# Altium PCB ComboCamera.PcbDoc (part 1 of 2)
Units mm, origin at the board's own origin, x right, y up, seen from the top; angles counter-clockwise.
Board outline 54.59 x 25.9 mm, 6 copper layers (L1, L2, Layer 1, Layer 2, L5, L6), stack 1.597 mm thick; 83 components, 54 nets, 269 pads, 161 vias.
Unrouted connection lines stored in the file: 227.
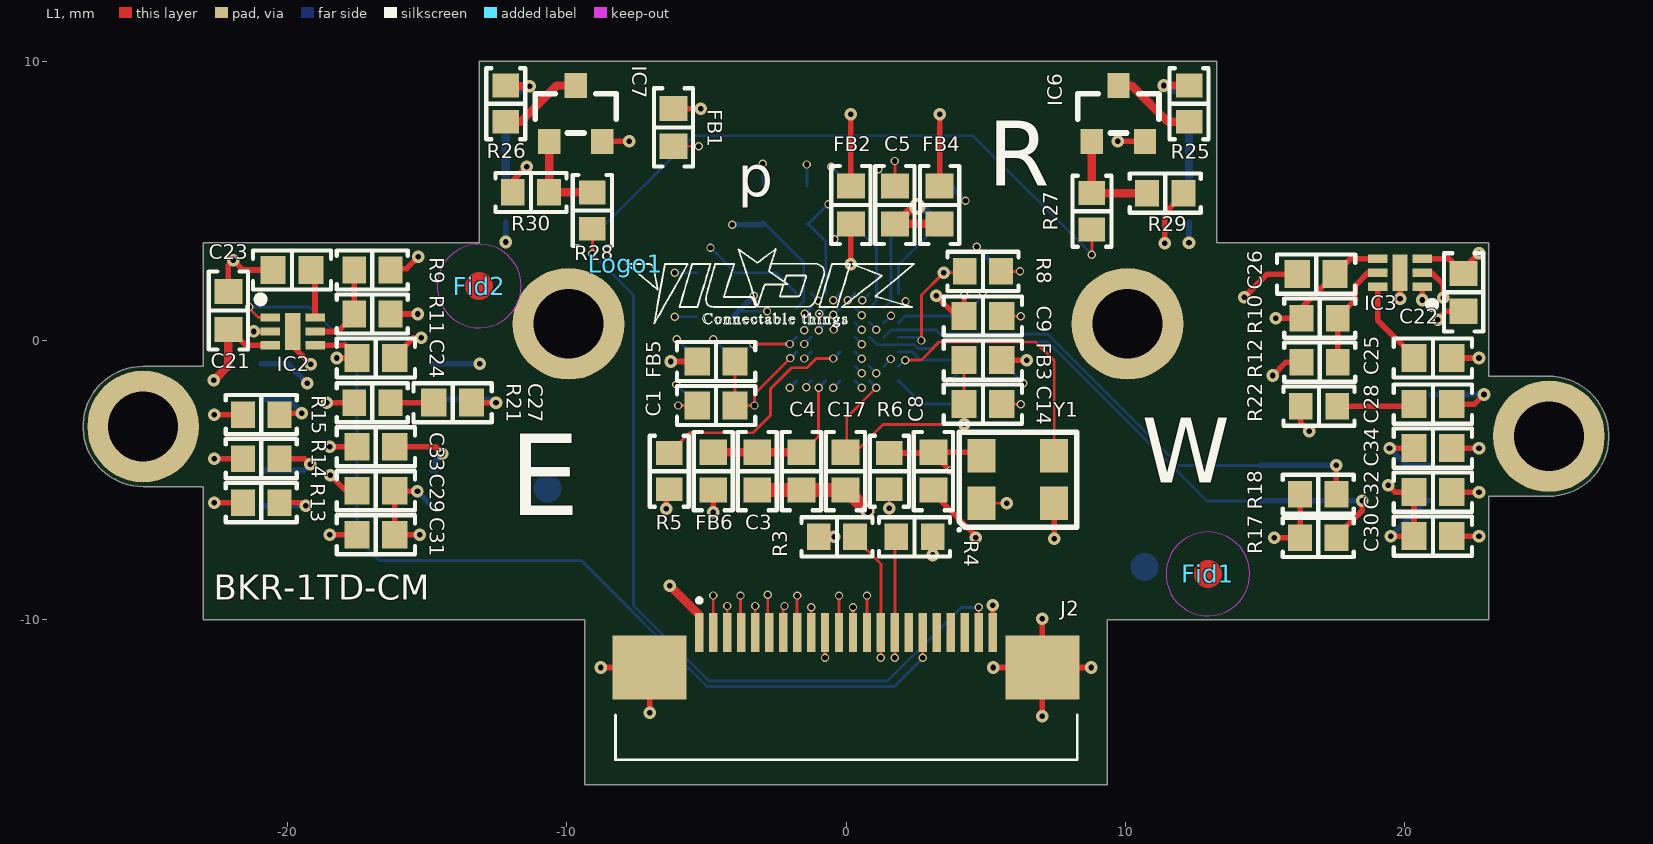
[diagram p0: L1 view]
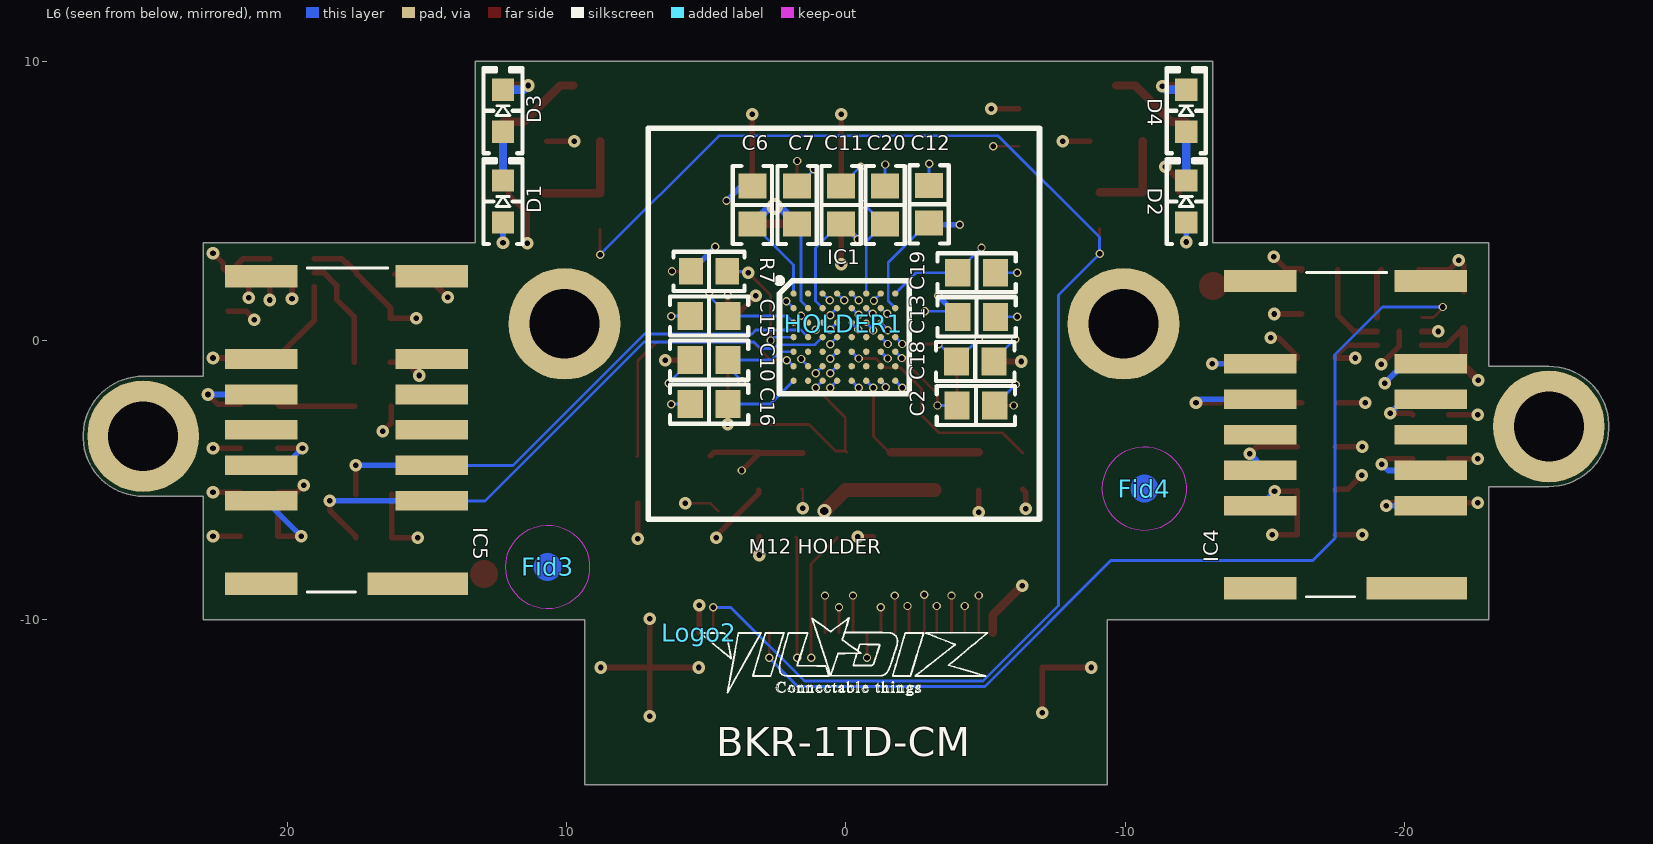
[diagram p1: L6 view, seen from below]
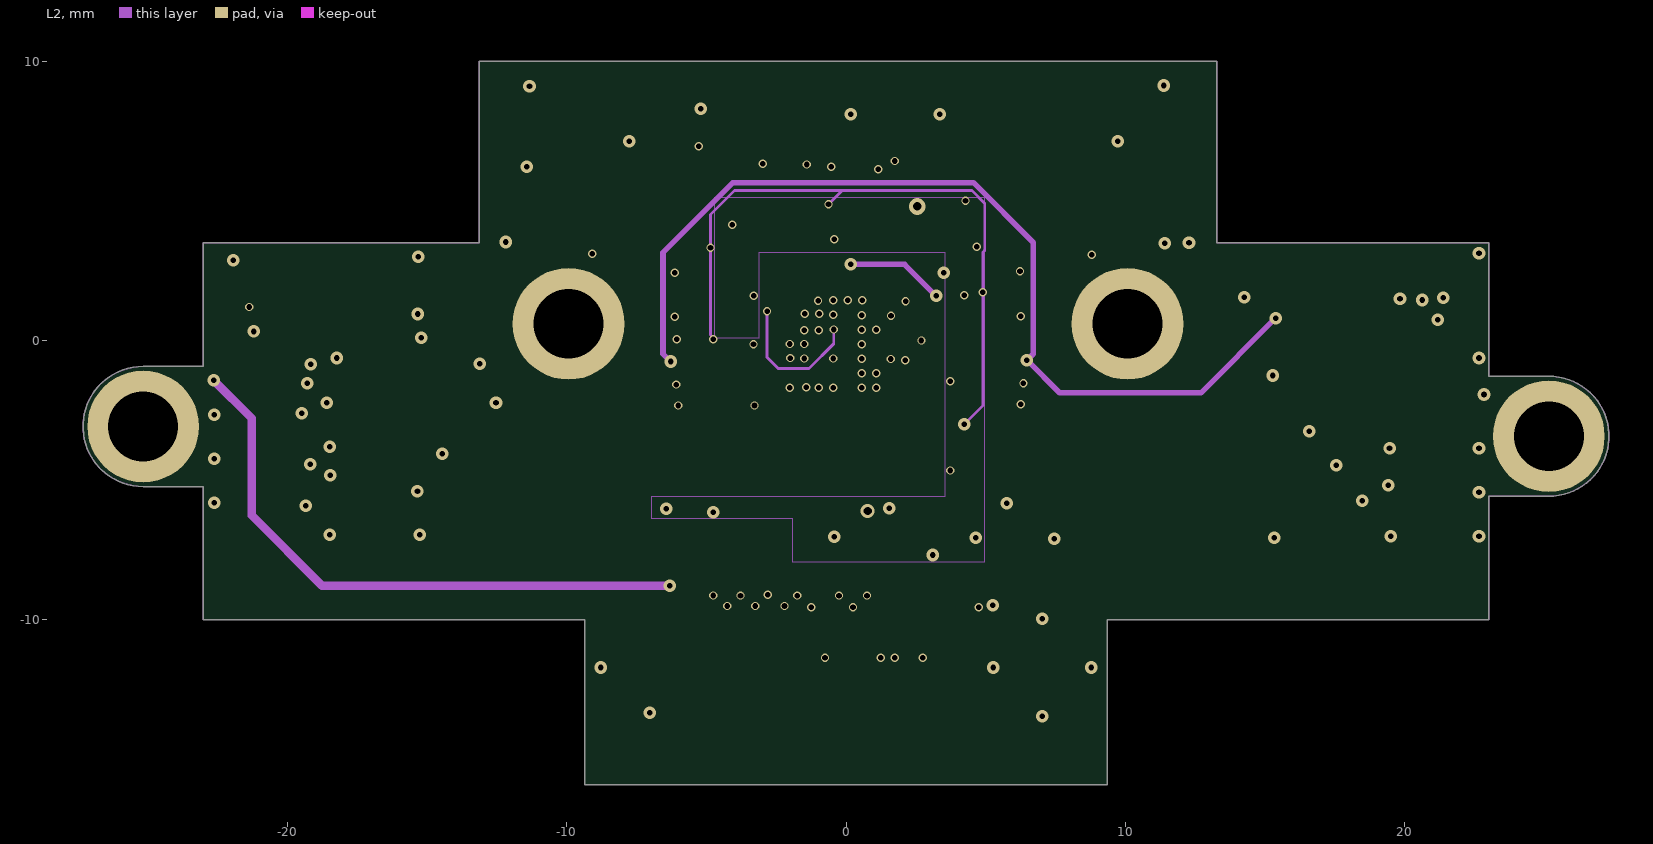
[diagram p2: L2]
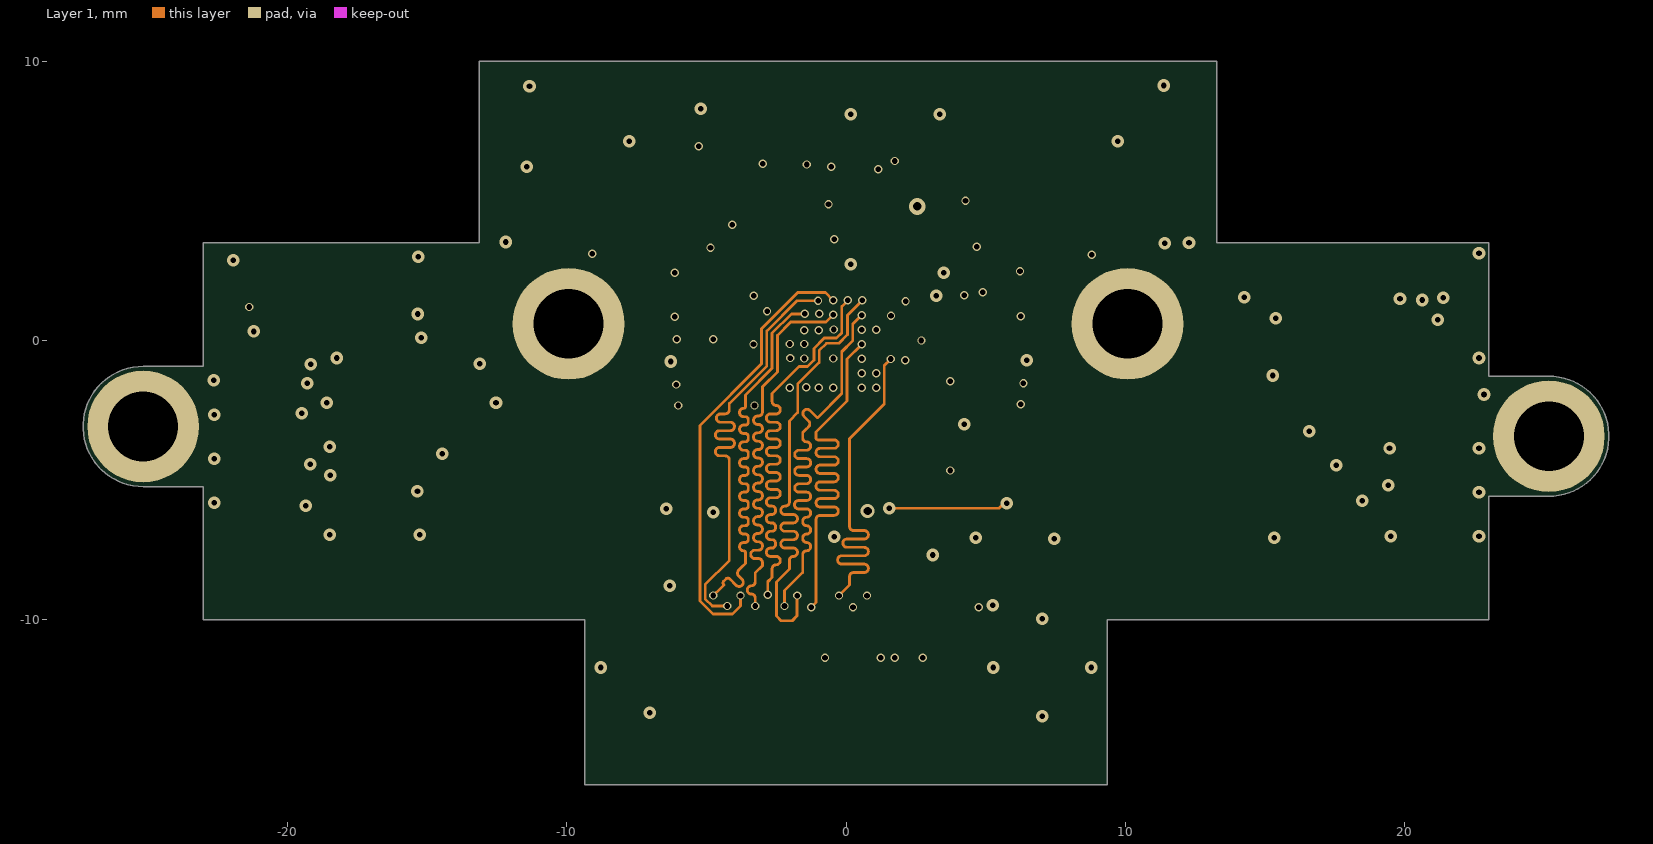
[diagram p3: Layer 1]
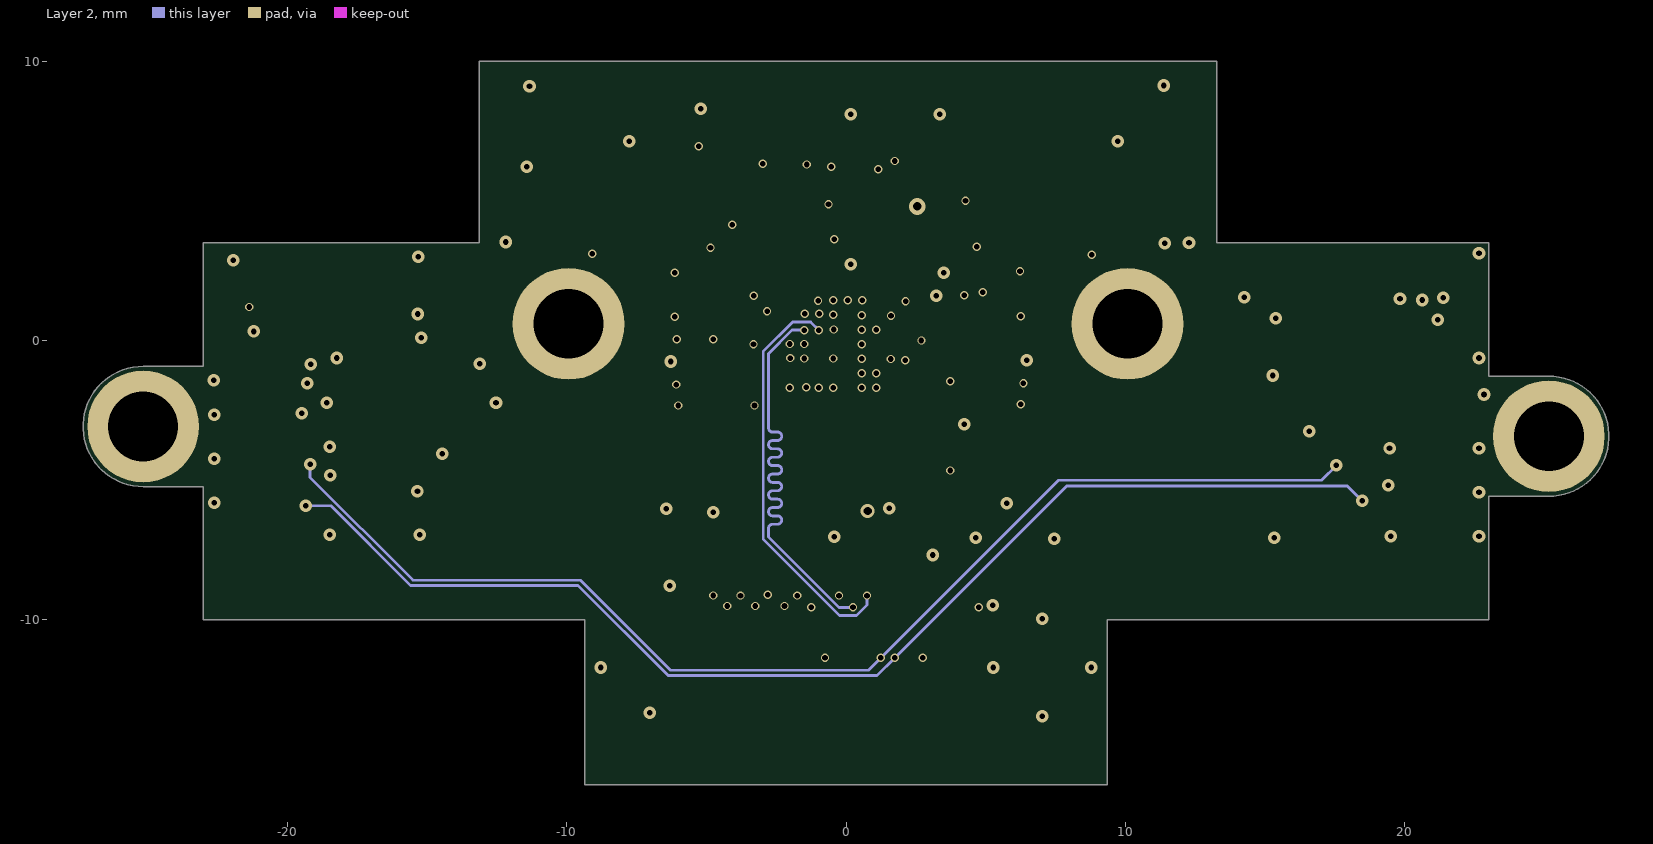
[diagram p4: Layer 2]
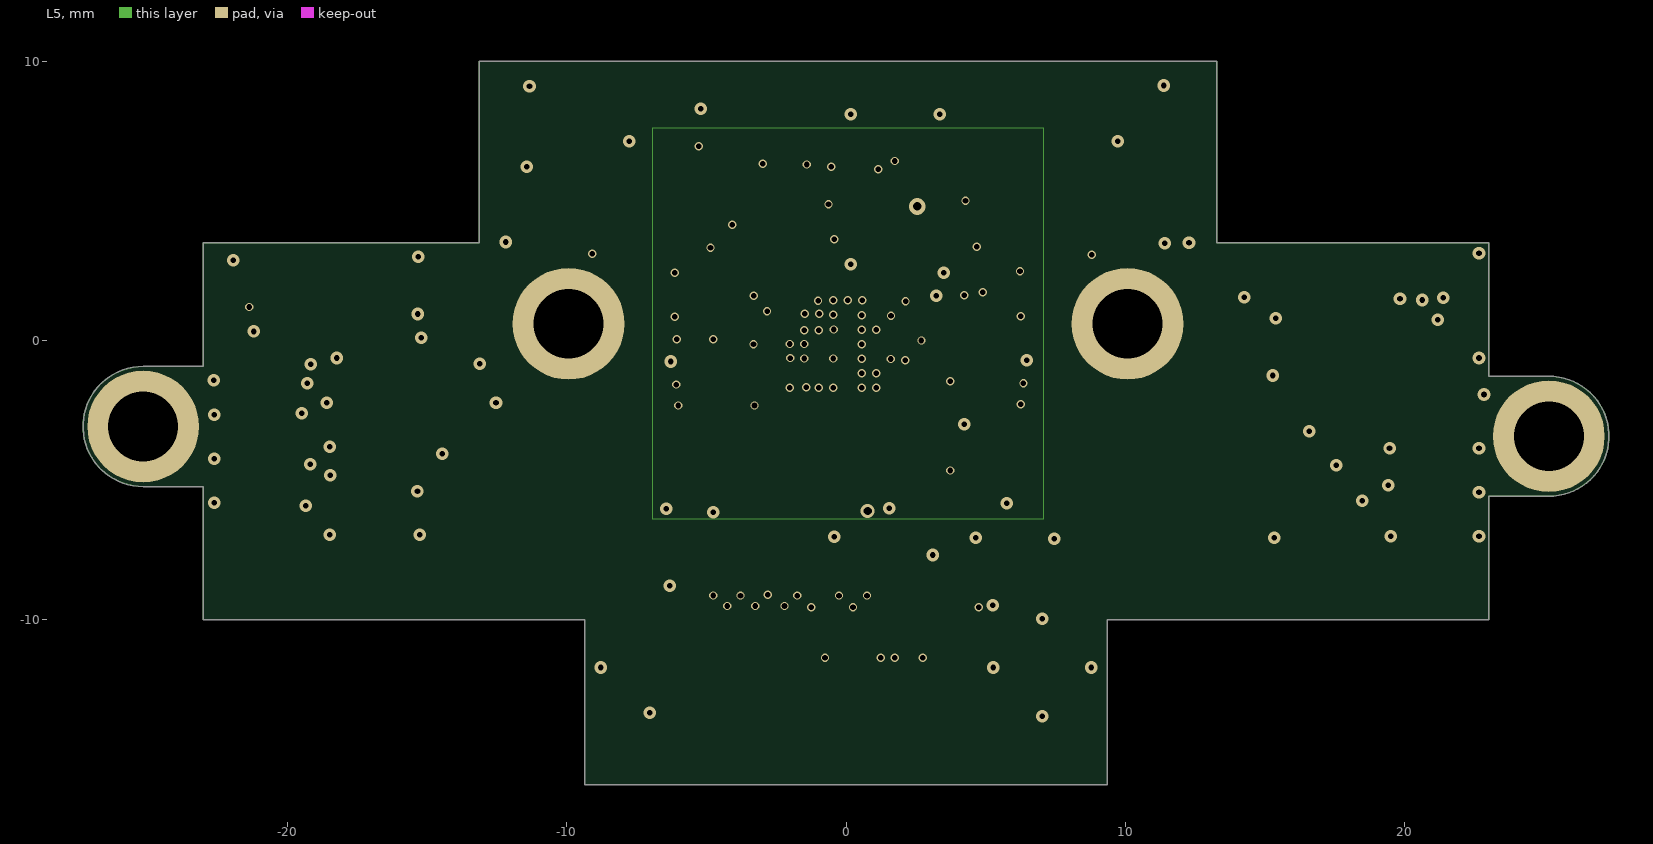
[diagram p5: L5]
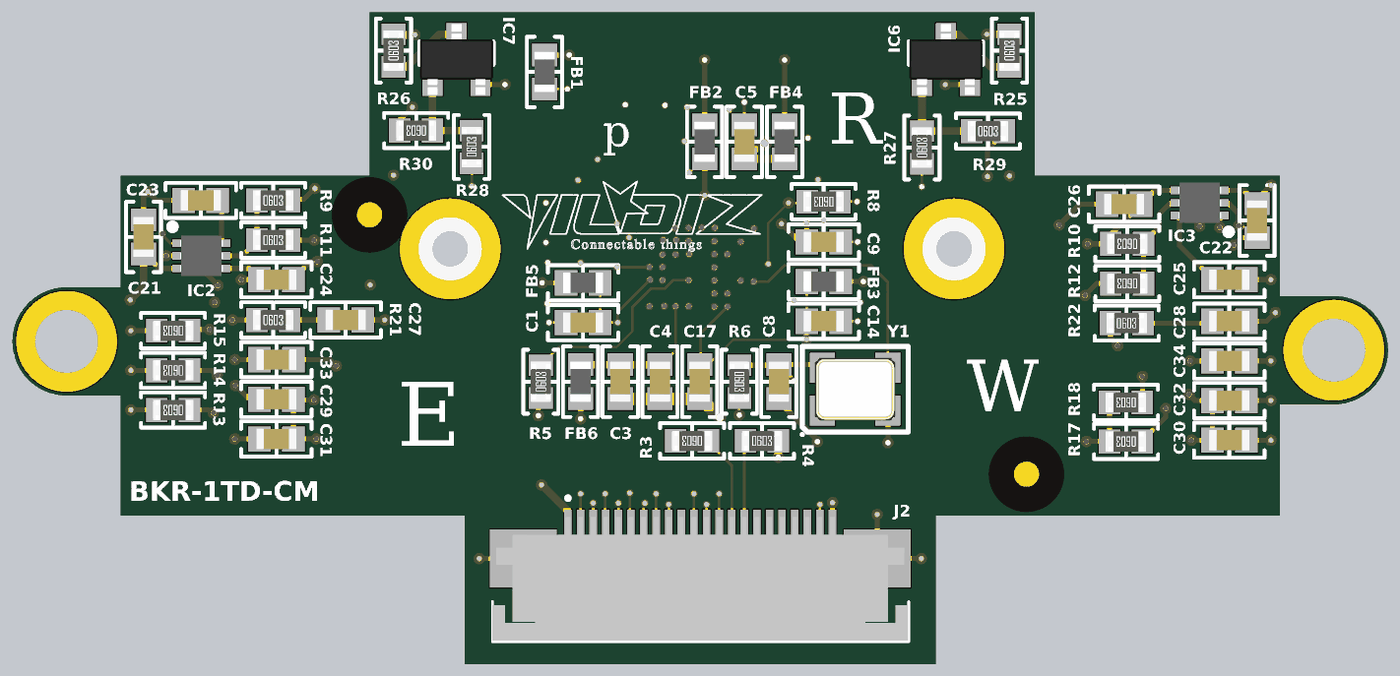
[diagram p6: 3D render of the assembled board from above, using the file's embedded part models]
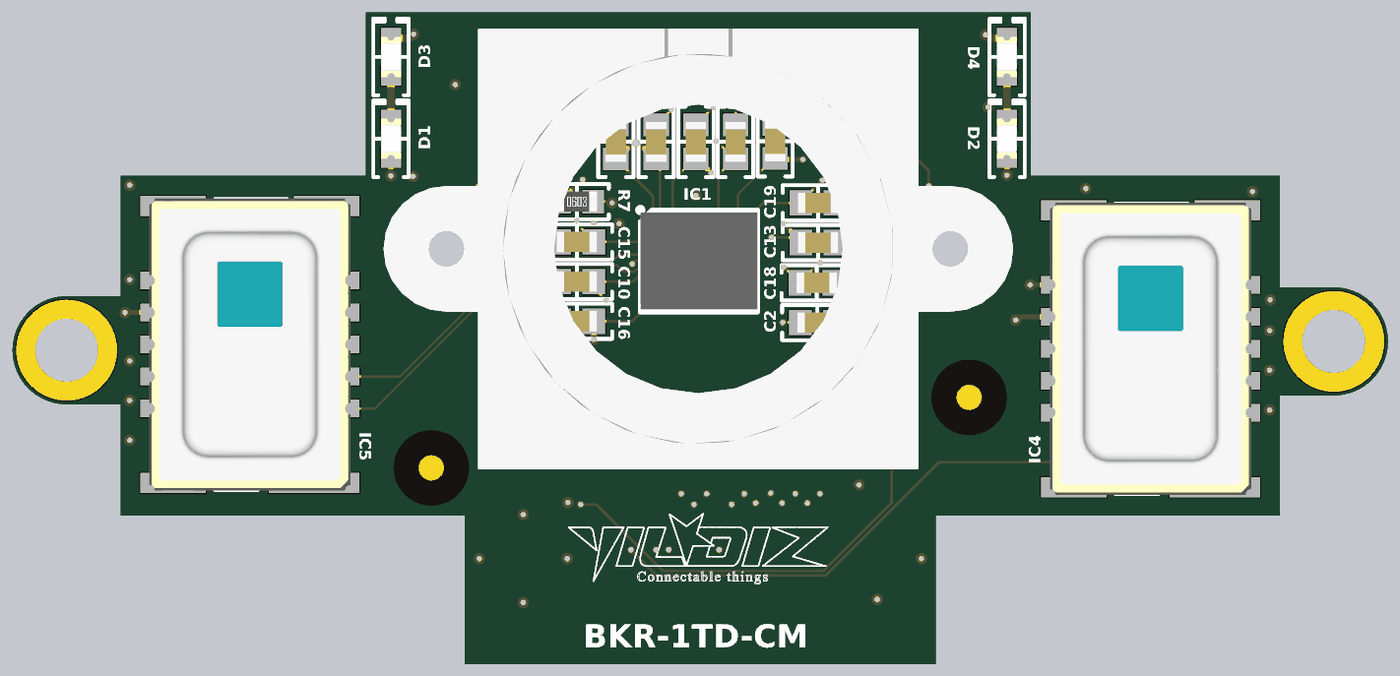
[diagram p7: 3D render of the assembled board from below, using the file's embedded part models]

## Layer stack, top to bottom
Top Solder: solder mask 0.0102, Solder Resist, Dk 3.5
L1: signal copper 0.035
Prepreg 1: prepreg 0.1, 2313, Dk 4.05
L2: signal copper 0.0175
Core 1: core 0.565, Core-009, Dk 4.5
Layer 1: signal copper 0.0175
Prepreg 2: prepreg 0.127, 2116, Dk 4.25
Layer 2: signal copper 0.0175
Core 2: core 0.565, Core-009, Dk 4.5
L5: signal copper 0.0175
Prepreg 3: prepreg 0.1, 2313, Dk 4.05
L6: signal copper 0.035
Bottom Solder: solder mask 0.0102, Solder Resist, Dk 3.5

## Board outline
-23,-10 -23,-5.225 -25.15,-5.225 cw(c-25.15,-3.075) -25.15,-0.925 -23,-0.925 -23,3.5 -13.125,3.5 -13.125,10 13.275,10 13.275,3.5 23,3.5 23,-1.275 25.15,-1.275 cw(c25.15,-3.425) 25.15,-5.575 23,-5.575 23,-10 9.35,-10 9.35,-15.9 -9.35,-15.9 -9.35,-10

## Design rules (kind name [scope] priority, off if disabled: settings)
Clearance [All] p1: gap=0.089 ignorepadtopadclearanceinfootprint=FALSE
MatchedLengths "Schematic Matched Net Lengths" [InNetClass('DCMI')] p1: tolerance=2.54 checknetsindiffpair=FALSE checkdiffpairvsdiffpair=TRUE checkxsignals=TRUE checkothers=TRUE
PolygonConnect [All] p1: connectstyle=Direct reliefconductorwidth=0.254 reliefentries=4 polygonreliefangle="90 Angle" airgapwidth=0.254
RoutingVias [All] p1: holewidth=0.2 width=0.3 viastyle="Through Hole" minholewidth=0.2 minwidth=0.3 maxholewidth=5 maxwidth=5
SolderMaskExpansion [All] p1: expansion=0.05
Width [All] p1: maxlimit=10 minlimit=0.089 preferedwidth=0.089
30 further rules are at their usual default settings.

## Classes and differential pairs
component class ComboCamera: Fid1 Fid2 Fid3 Fid4 Logo1
net class DCMI: DCMI_D0 DCMI_D1 DCMI_D2 DCMI_D3 DCMI_D4 DCMI_D5 DCMI_D6 DCMI_D7 DCMI_HSYNC DCMI_PIXCK DCMI_VSYNC
net class DCMI_D[0..7]: DCMI_D0 DCMI_D1 DCMI_D2 DCMI_D3 DCMI_D4 DCMI_D5 DCMI_D6 DCMI_D7
net class D[0..7]: D0 D1 D2 D3 D4 D5 D6 D7
component class "U_Thermal Camera": C27 C28 C29 C30 C31 C32 C33 C34 IC4 IC5 R13 R14 R15 R17 R18 R21 R22
component class U_Power: C21 C22 C23 C24 C25 C26 FB2 FB3 FB4 FB5 FB6 IC2 IC3 R9 R10 R11 R12
component class U_LED: D1 D2 D3 D4 IC6 IC7 R25 R26 R27 R28 R29 R30
component class U_Expansion: J2
component class "U_Digital Camera": C1 C2 C3 C4 C5 C6 C7 C8 C9 C10 C11 C12 C13 C14 C15 C16 C17 C18 C19 C20 FB1 HOLDER1 IC1 R3 R4 R5 R6 R7 R8 Y1

## Components (designator, comment, footprint, x,y, rotation, side; value= is the part's Value field where it differs from the comment)
C1 "1uF" "CAP 0603/1608" -4.65,-2.325 r0 top
C2 "100nF" "CAP 0603/1608" -4.65,-2.325 r0 bottom
C3 "1uF" "CAP 0603/1608" -3.175,-4.675 r90 top
C4 "100nF" "CAP 0603/1608" -1.6,-4.675 r90 top
C5 "1uF" "CAP 0603/1608" 1.75,4.85 r270 top
C6 "100nF" "CAP 0603/1608" 3.35,4.85 r270 bottom
C7 "100nF" "CAP 0603/1608" 1.75,4.85 r270 bottom
C8 "100nF" "CAP 0603/1608" 3.125,-4.675 r90 top
C9 "1uF" "CAP 0603/1608" 4.9,0.875 r180 top
C10 "100nF" "CAP 0603/1608" 4.9,-0.7 r180 bottom
C11 "100nF" "CAP 0603/1608" 0.175,4.85 r270 bottom
C12 "100nF" "CAP 0603/1608" -2.975,4.875 r270 bottom
C13 "100nF" "CAP 0603/1608" -4.675,0.85 r0 bottom
C14 "1uF" "CAP 0603/1608" 4.9,-2.275 r180 top
C15 "100nF" "CAP 0603/1608" 4.9,0.875 r180 bottom
C16 "100nF" "CAP 0603/1608" 4.9,-2.275 r180 bottom
C17 "100nF" "CAP 0603/1608" -0.025,-4.675 r90 top
C18 "100nF" "CAP 0603/1608" -4.625,-0.75 r0 bottom
C19 "100nF" "CAP 0603/1608" -4.675,2.425 r0 bottom
C20 "100nF" "CAP 0603/1608" -1.4,4.85 r270 bottom
C21 "1uF" "CAP 0603/1608" -22.1,1.075 r270 top
C22 "1uF" "CAP 0603/1608" 22.1,1.725 r90 top
C23 "100nF" "CAP 0603/1608" -19.825,2.525 r0 top
C24 "1uF" "CAP 0603/1608" -16.825,-0.625 r180 top
C25 "100nF" "CAP 0603/1608" 21,-0.625 r180 top
C26 "1uF" "CAP 0603/1608" 16.825,2.375 r0 top
C27 "1uF" "CAP 0603/1608" -14.075,-2.225 r0 top
C28 "1uF" "CAP 0603/1608" 21,-2.275 r0 top
C29 "100nF" "CAP 0603/1608" -16.825,-5.375 r180 top
C30 "100nF" "CAP 0603/1608" 21,-7 r0 top
C31 "10uF" "CAP 0603/1608" -16.825,-6.95 r0 top
C32 "10uF" "CAP 0603/1608" 21,-5.425 r180 top
C33 "1.5uF" "CAP 0603/1608" -16.825,-3.8 r180 top
C34 "1.5uF" "CAP 0603/1608" 21,-3.85 r0 top
D1 "#NAME?" "LED 0603/1608" 12.275,4.975 r90 bottom
D2 "#NAME?" "LED 0603/1608" -12.175,4.975 r90 bottom
D3 "#NAME?" "LED 0603/1608" 12.275,8.225 r90 bottom
D4 "#NAME?" "LED 0603/1608" -12.175,8.225 r90 bottom
FB1 "#NAME?" "FER 0603/1608" -6.175,7.625 r90 top
FB2 "#NAME?" "FER 0603/1608" 0.175,4.85 r90 top
FB3 "#NAME?" "FER 0603/1608" 4.9,-0.7 r0 top
FB4 "#NAME?" "FER 0603/1608" 3.35,4.85 r90 top
FB5 "#NAME?" "FER 0603/1608" -4.65,-0.75 r180 top
FB6 "#NAME?" "FER 0603/1608" -4.75,-4.675 r270 top
Fid1 "Fiducial mark" Fiducial 12.95,-8.35 r0 top
Fid2 "Fiducial mark" Fiducial -13.125,1.95 r90 top
Fid3 "Fiducial mark" Fiducial 10.675,-8.1 r90 bottom
Fid4 "Fiducial mark" Fiducial -10.675,-5.3 r90 bottom
HOLDER1 "#NAME?" "M12 LENS HOLDER" 0.075,0.6 r0 bottom locked
IC1 "#NAME?" "ON SEMI MT9M114 BGA-55" 0.056,0.12 r180 bottom locked
IC2 "#NAME?" "MICREL MLF-6 1.6x1.6MM" -19.8,0.325 r0 top
IC3 "#NAME?" "MICREL MLF-6 1.6x1.6MM" 19.825,2.425 r180 top
IC4 "#NAME?" "PANASONIC AMG8853" -17.875,-3.37 r90 bottom locked
IC5 "#NAME?" "PANASONIC AMG8853" 17.875,-3.2 r90 bottom locked
IC6 "#NAME?" "DIODES SOT-23-3" 9.75,8.125 r90 top
IC7 "#NAME?" "DIODES SOT-23-3" -9.675,8.125 r90 top
J2 "#NAME?" fpc-22 0,-11.075 r0 top locked
Logo1 "Logo symbol" LOGO_YILDIZIOT -7.875,2.75 r0 top
Logo2 "Logo symbol" LOGO_YILDIZIOT 5.25,-10.45 r180 bottom (schematic designator Logo1)
R3 "1.5kR" "RES 0603/1608" -0.325,-7.025 r180 top
R4 "1.5kR" "RES 0603/1608" 2.45,-7.025 r0 top
R5 "10kR" "RES 0603/1608" -6.325,-4.675 r90 top
R6 "10kR" "RES 0603/1608" 1.55,-4.675 r270 top
R7 "10kR" "RES 0603/1608" 4.9,2.475 r180 bottom
R8 "10kR" "RES 0603/1608" 4.9,2.475 r180 top
R9 "14kR" "RES 0603/1608" -16.95,2.525 r0 top
R10 "4.42kR" "RES 0603/1608" 16.95,0.8 r180 top
R11 "10kR" "RES 0603/1608" -16.95,0.95 r0 top
R12 "10kR" "RES 0603/1608" 16.95,-0.775 r180 top
R13 "10kR" "RES 0603/1608" -20.925,-5.8 r180 top
R14 "10kR" "RES 0603/1608" -20.925,-4.225 r180 top
R15 "10kR" "RES 0603/1608" -20.925,-2.65 r180 top
R17 "10kR" "RES 0603/1608" 16.9,-7.05 r180 top
R18 "10kR" "RES 0603/1608" 16.9,-5.5 r180 top
R21 "20R" "RES 0603/1608" -16.95,-2.225 r0 top
R22 "20R" "RES 0603/1608" 16.925,-2.35 r0 top
R25 "10R" "RES 0603/1608" 12.275,8.475 r90 top
R26 "10R" "RES 0603/1608" -12.175,8.475 r90 top
R27 "220R" "RES 0603/1608" 8.8,4.625 r90 top
R28 "220R" "RES 0603/1608" -9.075,4.65 r90 top
R29 "10kR" "RES 0603/1608" 11.425,5.275 r0 top
R30 "10kR" "RES 0603/1608" -11.275,5.3 r180 top
Y1 "24MHz" "Abracon ASTX-11" 6.15,-4.975 r0 top

## Footprints (in the part's own frame and the unit in brackets; to place one, negate y for a bottom-side part, rotate by r counter-clockwise, add the part's x,y. Pads: shape width x height; smd on the part's side, far side on the other; paste and mask are expansions set on the pad)
"Abracon ASTX-11" [mm] "Crystal, 4-Leads, Body 2.50x3.20mm, Pitch 2.38mm, IPC Medium Density"
  rect 1x1.2 smd: 1(-1.3,-0.85) 2(1.3,-0.85) 3(1.3,0.85) 4(-1.3,0.85)
  silkscreen extent -2.15,-1.85 2.1,1.7, body extent -1.61,-1.26 1.61,1.26, height 0.9
"CAP 0603/1608" [mm] "Chip Capacitor, 2-Leads, Body 1.60x0.80mm, IPC Medium Density"
  rect 0.9x1 smd: 1(-0.675,0) 2(0.675,0)
  silkscreen extent -1.4,-0.7 1.4,0.7, body extent -0.8,-0.41 0.8,0.41, height 0.82
"DIODES SOT-23-3" [mm] "SOT23, 3-Leads, Body 2.90x2.40mm, Pitch 0.95mm, IPC Medium Density"
  rect 0.9x0.8 smd: 1(-1,0.95) 2(-1,-0.95) 3(1,0)
  silkscreen extent -0.7,-1.45 0.7,1.45, body extent -1.41,-1.45 1.41,1.45, height 1.5
"FER 0603/1608" [mm] "Chip Ferrite, 2-Leads, Body 1.60x0.80mm, IPC Medium Density"
  rect 0.9x1 smd: 1(-0.675,0) 2(0.675,0)
  silkscreen extent -1.4,-0.7 1.4,0.7, body extent -0.8,-0.41 0.8,0.41, height 0.82
Fiducial [mm] "Electrolitic Radial Capacitor, 5mm pin space, 0.8mm Hole, 10.1mm diametre, 15.2 height"
  L1 circle w1: c0,0 r0
  L1 keep-out circle w0.01: c0,0 r1.5
fpc-22 [mm] "SFV22R-2STE1HLF"
  rect 0.3x1.4 smd: 1(-5.25,0.625) 2(-4.75,0.625) 3(-4.25,0.625) 4(-3.75,0.625) 5(-3.25,0.625) 6(-2.75,0.625) 7(-2.25,0.625) 8(-1.75,0.625) 9(-1.25,0.625) 10(-0.75,0.625) 11(-0.25,0.625) 12(0.25,0.625) 13(0.75,0.625) 14(1.25,0.625) 15(1.75,0.625) 16(2.25,0.625) 17(2.75,0.625) 18(3.25,0.625) 19(3.75,0.625) 20(4.25,0.625) 21(4.75,0.625) 22(5.25,0.625)
  rect 2.65x2.3 smd: MP1(-7.025,-0.625) MP2(7.025,-0.625)
  silkscreen extent -8.25,-3.93 8.27,1.82, body extent -8.25,-3.88 8.25,1.02, height 1.82
"LED 0603/1608" [mm] "Chip Diode, 2-Leads, Body 1.60x0.80mm, IPC Medium Density"
  rect 0.8x0.8 smd: 1(-0.75,0) 2(0.75,0)
  silkscreen extent -1.52,-0.7 1.52,0.7, body extent -0.8,-0.4 0.8,0.4, height 0.53
LOGO_YILDIZIOT [mm] "YýLDýZ IoT Logo"
  silkscreen extent 0.02,-2.27 10.31,0.53
"M12 LENS HOLDER" [mm]
  round 4 hole 2.5: GND(-10,0) GND(10,0)
  silkscreen extent -7,-7 7,7, body extent -12.5,-8.75 12.5,8.75, height 14.1
"MICREL MLF-6 1.6x1.6MM" [mm] "6-UFDFN Exposed Pad, 6-TMLF®"
  rect 0.7x0.3 smd: 1(-0.8,0.5) 2(-0.8,0) 3(-0.8,-0.5) 4(0.8,-0.5) 5(0.8,0) 6(0.8,0.5)
  rect 0.55x1.31 smd: 7(0,0)
  silkscreen extent -1.27,1.03 -1.02,1.27, body extent -0.85,-0.8 0.85,0.8, height 0.6
"ON SEMI MT9M114 BGA-55" [mm] "ODCSP55 4.7x3.9 55-Ball Package"
  round 0.226 smd: A1(-1.82,1.56) A2(-1.3,1.56) A3(-0.78,1.56) A4(-0.26,1.56) A5(0.26,1.56) A6(0.78,1.56) A7(1.3,1.56) A8(1.82,1.56) B1(-1.82,1.04) B2(-1.3,1.04) B3(-0.78,1.04) B4(-0.26,1.04) B5(0.26,1.04) B6(0.78,1.04) B7(1.3,1.04) B8(1.82,1.04) C1(-1.82,0.52) C2(-1.3,0.52) C3(-0.78,0.52) C4(-0.26,0.52) C5(0.26,0.52) C6(0.78,0.52) C7(1.3,0.52) D1(-1.82,0) D2(-1.3,0) D3(-0.78,0) D4(-0.26,0) D5(0.26,0) D6(0.78,0) D7(1.3,0) D8(1.82,0) E1(-1.82,-0.52) E2(-1.3,-0.52) E3(-0.78,-0.52) E4(-0.26,-0.52) E5(0.26,-0.52) E6(0.78,-0.52) E7(1.3,-0.52) E8(1.82,-0.52) F1(-1.82,-1.04) F2(-1.3,-1.04) F3(-0.78,-1.04) F4(-0.26,-1.04) F5(0.26,-1.04) F6(0.78,-1.04) F7(1.3,-1.04) F8(1.82,-1.04) G1(-1.82,-1.56) G2(-1.3,-1.56) G3(-0.78,-1.56) G4(-0.26,-1.56) G5(0.26,-1.56) G6(0.78,-1.56) G7(1.3,-1.56) G8(1.82,-1.56)
  silkscreen extent -2.42,-2.02 2.32,2.12, body extent -2.32,-1.92 2.32,1.92, height 0.74
"PANASONIC AMG8853" [mm]
  rect 0.8x3.6 smd: 1(-5.5,-2.55)
  rect 0.7x2.6 smd: 2(-2.54,-3.05) 3(-1.27,-3.05) 4(0,-3.05) 5(1.27,-3.05) 6(2.54,-3.05) 9(2.54,3.05) 10(1.27,3.05) 11(0,3.05) 12(-1.27,3.05) 13(-2.54,3.05)
  rect 0.8x2.6 smd: 7(5.5,-3.05) 8(5.5,3.05) 14(-5.5,3.05)
  silkscreen extent -5.8,-1.47 5.8,1.4, body extent -5.8,-4 5.8,4, height 4.3
"RES 0603/1608" [mm] "Chip Resistor, 2-Leads, Body 1.60x0.80mm, IPC Medium Density"
  rect 0.85x0.95 smd: 1(-0.65,0) 2(0.65,0)
  silkscreen extent -1.27,-0.7 1.27,0.7, body extent -0.8,-0.4 0.8,0.4, height 0.45

## Part data
C1 C3 C5 C9 C14 C21 C22 C24 C26 C27 C28: library part "Capacitor - Ceramic", "Ceramic, SMT Capacitor", Case/Package=0603, Case Code (Metric)=1608, Dielectric=X5R, Manufacturer=Samsung, Manufacturer Part Number=CL10A105KP8NNNC, Max Operating Temperature=85°C, Min Operating Temperature=-55°C, Package Quantity=1, Supplier Part Number 1=1276-1182-1-ND, Tolerance=10%, Voltage=10V, Capacitance=1uF, Case Code (Imperial)=0603, ComponentLink1Description=https://datasheet.ciiva.com/15195/getdatasheetpartid-358616-15195708.pdf?src-supplier=Verical, ComponentLink1URL=https://datasheet.ciiva.com/15195/getdatasheetpartid-358616-15195708.pdf?src-supplier=Verical, ComponentLink2Description=https://datasheet.ciiva.com/16358/cl05b104kq5nnnc-16358431.pdf?src-supplier=Future+Electronics, ComponentLink2URL=https://datasheet.ciiva.com/16358/cl05b104kq5nnnc-16358431.pdf?src-supplier=Future+Electronics, Contact Plating=Tin, Depth=0.8mm, Height=0.8mm, Length=1.6mm, Mount="Surface Mount", Packaging="Tape and Reel", Pricing 1="1 = 0,10000, 10 = 0,03800, 100 = 0,01680, 500 = 0,01200, 1000 = 0,00943 (USD)", Radiation Hardening=No, RoHS=Yes, Stock 1=4590831, Supplier 1=Digi-Key, Thickness=0.035inch, Voltage Rating=10V, Width=0.031inch
C2 C4 C6 C7 C8 C10 C11 C12 C13 C15 C16 C17 C18 C19 C20 C23 C25 C29 C30: library part "Capacitor - Ceramic", "Ceramic, SMT Capacitor", Case/Package=0603, Case Code (Metric)=1608, Dielectric=X7R, Manufacturer=Samsung, Manufacturer Part Number=CL10B104JB8NNNC, Max Operating Temperature=125°C, Min Operating Temperature=-55°C, Package Quantity=1, Supplier Part Number 1=1276-1033-1-ND, Tolerance=5%, Voltage=50V, Capacitance=100nF, Case Code (Imperial)=0603, ComponentLink1Description=https://media.digikey.com/pdf/Data%20Sheets/Samsung%20PDFs/CL_Series_MLCC_ds.pdf?src-supplier=Digi-Key, ComponentLink1URL=https://media.digikey.com/pdf/Data%20Sheets/Samsung%20PDFs/CL_Series_MLCC_ds.pdf?src-supplier=Digi-Key, ComponentLink2Description=https://www.verical.com/server-webapp/html/getDatasheet?partID=359321&src-supplier=Verical, ComponentLink2URL=https://www.verical.com/server-webapp/html/getDatasheet?partID=359321&src-supplier=Verical, ComponentLink3Description=http://www1.futureelectronics.com/doc/SAMSUNG/CL10B104JB8NNNC.pdf?src-supplier=Future+Electronics, ComponentLink3URL=http://www1.futureelectronics.com/doc/SAMSUNG/CL10B104JB8NNNC.pdf?src-supplier=Future+Electronics, ComponentLink4Description=https://produktinfo.conrad.com/datenblaetter/450000-474999/456613-da-01-en-VS_KONDENSATOR_0603.pdf?src-supplier=Conrad, ComponentLink4URL=https://produktinfo.conrad.com/datenblaetter/450000-474999/456613-da-01-en-VS_KONDENSATOR_0603.pdf?src-supplier=Conrad, Contact Plating=Tin, Depth=0.8mm, Height=0.8mm, Length=1.6mm, Material=Ceramic, Mount="Surface Mount", Packaging="Tape and Reel", Pricing 1="1 = 0,10000, 10 = 0,05300, 100 = 0,02350, 500 = 0,01680, 1000 = 0,01320 (USD)", Radiation Hardening=No, RoHS=Yes, Stock 1=223594, Supplier 1=Digi-Key, Thickness=0.035inch, Voltage Rating=50V, Width=0.031inch
C31 C32: library part "Capacitor - Ceramic", "Ceramic, SMT Capacitor", Case/Package=0603, Case Code (Metric)=1608, Dielectric=X5R, Manufacturer=Samsung, Manufacturer Part Number=CL10A106MQ8NNNC, Max Operating Temperature=85°C, Min Operating Temperature=-55°C, Package Quantity=1, Supplier Part Number 1=1276-1119-1-ND, Tolerance=20%, Voltage=6.3V, Capacitance=10uF, Case Code (Imperial)=0603, ComponentLink1Description=https://datasheet.ciiva.com/25798/cl10a106mq8nnnc-25798320.pdf?src-supplier=Digi-Key, ComponentLink1URL=https://datasheet.ciiva.com/25798/cl10a106mq8nnnc-25798320.pdf?src-supplier=Digi-Key, ComponentLink2Description=https://datasheet.ciiva.com/26838/getdatasheetpartid-357557-26838347.pdf?src-supplier=Verical, ComponentLink2URL=https://datasheet.ciiva.com/26838/getdatasheetpartid-357557-26838347.pdf?src-supplier=Verical, ComponentLink3Description=https://datasheet.ciiva.com/16437/cl05b104kq5nnnc-16437327.pdf?src-supplier=Future+Electronics, ComponentLink3URL=https://datasheet.ciiva.com/16437/cl05b104kq5nnnc-16437327.pdf?src-supplier=Future+Electronics, Contact Plating=Tin, Depth=0.8mm, Height=0.8mm, Length=1.6mm, Mount="Surface Mount", Packaging="Tape and Reel", Pricing 1="1 = 0,15000, 10 = 0,11000, 100 = 0,05150, 500 = 0,03614, 1000 = 0,02992 (USD)", Radiation Hardening=No, RoHS=Yes, Stock 1=4408315, Supplier 1=Digi-Key, Thickness=0.035inch, Voltage Rating=6.3V, Width=0.031inch
C33 C34: library part "Capacitor - Ceramic", "Ceramic, SMT Capacitor", Case/Package=0603, Case Code (Metric)=1608, Manufacturer=TDK, Manufacturer Part Number=C1608X7S1C155K080AC, Max Operating Temperature=125°C, Min Operating Temperature=-55°C, Supplier Part Number 1=445-174769-1-ND, Tolerance=10%, Voltage Rating=16V, Capacitance=1.5uF, Case Code (Imperial)=0603, ComponentLink1Description=https://datasheet.ciiva.com/15195/getdatasheetpartid-358616-15195708.pdf?src-supplier=Verical, ComponentLink1URL=https://datasheet.ciiva.com/15195/getdatasheetpartid-358616-15195708.pdf?src-supplier=Verical, ComponentLink2Description=https://datasheet.ciiva.com/16358/cl05b104kq5nnnc-16358431.pdf?src-supplier=Future+Electronics, ComponentLink2URL=https://datasheet.ciiva.com/16358/cl05b104kq5nnnc-16358431.pdf?src-supplier=Future+Electronics, ComponentLink3Description=https://product.tdk.com/info/en/catalog/spec/mlccspec_commercial_general_midvoltage_en.pdf?src-supplier=Digi-Key, ComponentLink3URL=https://product.tdk.com/info/en/catalog/spec/mlccspec_commercial_general_midvoltage_en.pdf?src-supplier=Digi-Key, ComponentLink4Description=https://product.tdk.com/info/en/catalog/datasheets/mlcc_commercial_general_en.pdf?src-supplier=Digi-Key, ComponentLink4URL=https://product.tdk.com/info/en/catalog/datasheets/mlcc_commercial_general_en.pdf?src-supplier=Digi-Key, Mount="Surface Mount", Packaging="Tape and Reel", Pricing 1="1 = 0,23000, 10 = 0,15900, 100 = 0,09030, 500 = 0,06376, 1000 = 0,05579 (USD)", RoHS=No, Stock 1=2796, Supplier 1=Digi-Key
D1 D3: library part LED, "Chip LED", Manufacturer="Wurth Electronics", Manufacturer Part Number=15406085BA300, Supplier Part Number 1=732-12005-1-ND, ComponentLink1Description=http://katalog.we-online.de/pbs/datasheet/15406085BA300.pdf?src-supplier=Digi-Key, ComponentLink1URL=http://katalog.we-online.de/pbs/datasheet/15406085BA300.pdf?src-supplier=Digi-Key, Pricing 1="1 = 0,60000, 10 = 0,54200, 100 = 0,50400, 500 = 0,46600, 1000 = 0,42800 (USD)", RoHS=No, Stock 1=3808, Supplier 1=Digi-Key
D2 D4: library part LED, "Chip LED", Case/Package=0603, Case Code (Metric)=1608, Color=White, Forward Voltage=3V, Lens Color=Clear, Manufacturer=Inolux, Manufacturer Part Number=IN-S63AT5UW, Supplier Part Number 1=1830-1063-1-ND, Test Current=5mA, Case Code (Imperial)=0603, ComponentLink1Description=http://katalog.we-online.de/pbs/datasheet/15406085BA300.pdf?src-supplier=Digi-Key, ComponentLink1URL=http://katalog.we-online.de/pbs/datasheet/15406085BA300.pdf?src-supplier=Digi-Key, ComponentLink2Description=http://www.inolux-corp.com/datasheet/SMDLED/Mono%20Color%20Top%20View/IN-S63AT%20Series_V1.1.pdf?src-supplier=Digi-Key, ComponentLink2URL=http://www.inolux-corp.com/datasheet/SMDLED/Mono%20Color%20Top%20View/IN-S63AT%20Series_V1.1.pdf?src-supplier=Digi-Key, Height=0.4mm, Length=1.6mm, Lens Size=0.8mm, Lens Style=Flat, Lens Transparency=Clear, Luminous Intensity=900mcd, Mount="Surface Mount", Packaging="Tape and Reel", Pricing 1="1 = 0,33000, 10 = 0,24000, 100 = 0,11360, 500 = 0,07576, 1000 = 0,05934 (USD)", RoHS=No, Stock 1=44672, Supplier 1=Digi-Key, Viewing Angle=120°, Width=0.8mm
FB1 FB2 FB3 FB4 FB5 FB6: library part "Ferrite Chip", "SMT Ferrite Chip", Case/Package=0603, Case Code (Metric)=1608, Current Rating=500mA, DC Resistance (DCR)=380mR, Frequency=100MHz, Manufacturer=Murata, Manufacturer Part Number=BLM18AG601SN1D, Max Operating Temperature=125°C, Min Operating Temperature=-55°C, Package Quantity=1, Supplier Part Number 1=490-1014-1-ND, Tolerance=25%, Case Code (Imperial)=0603, ComponentLink1Description=https://datasheet.ciiva.com/19460/1844766-19460213.pdf?src-supplier=Jameco, ComponentLink1URL=https://datasheet.ciiva.com/19460/1844766-19460213.pdf?src-supplier=Jameco, ComponentLink2Description=https://datasheet.ciiva.com/29347/442309-da-01-en-chip-drossel-0603-600r-500ma-1-6x0-8mm-29347900.pdf?src-supplier=Conrad, ComponentLink2URL=https://datasheet.ciiva.com/29347/442309-da-01-en-chip-drossel-0603-600r-500ma-1-6x0-8mm-29347900.pdf?src-supplier=Conrad, ComponentLink3Description=https://datasheet.ciiva.com/41449/001172228-da-01-en-drossel-0603-600r-1-6x0-8mm-4000st-41449517.pdf?src-supplier=Conrad, ComponentLink3URL=https://datasheet.ciiva.com/41449/001172228-da-01-en-drossel-0603-600r-1-6x0-8mm-4000st-41449517.pdf?src-supplier=Conrad, ComponentLink4Description=https://datasheet.ciiva.com/1012/l0110s0100blm18a-1012018.pdf?src-supplier=Digi-Key, ComponentLink4URL=https://datasheet.ciiva.com/1012/l0110s0100blm18a-1012018.pdf?src-supplier=Digi-Key, ComponentLink5Description=https://datasheet.ciiva.com/1012/l0110s0100blm18a-1012019.pdf?src-supplier=Digi-Key, ComponentLink5URL=https://datasheet.ciiva.com/1012/l0110s0100blm18a-1012019.pdf?src-supplier=Digi-Key, ComponentLink6Description=https://datasheet.ciiva.com/1466/1756147-1466934.pdf?src-supplier=Element14, ComponentLink6URL=https://datasheet.ciiva.com/1466/1756147-1466934.pdf?src-supplier=Element14, ComponentLink7Description=https://datasheet.ciiva.com/3081/l0110s0100blm18a-3081613.pdf?src-supplier=Avnet, ComponentLink7URL=https://datasheet.ciiva.com/3081/l0110s0100blm18a-3081613.pdf?src-supplier=Avnet, ComponentLink8Description=https://datasheet.ciiva.com/1012/l0110s0100blm18a-1012017.pdf?src-supplier=Digi-Key, ComponentLink8URL=https://datasheet.ciiva.com/1012/l0110s0100blm18a-1012017.pdf?src-supplier=Digi-Key, ComponentLink9Description=https://datasheet.ciiva.com/1466/1756147-1466933.pdf?src-supplier=Element14, ComponentLink9URL=https://datasheet.ciiva.com/1466/1756147-1466933.pdf?src-supplier=Element14, ComponentLink10Description=https://datasheet.ciiva.com/16210/l0110s0100blm18a-16210006.pdf?src-supplier=Future+Electronics, ComponentLink10URL=https://datasheet.ciiva.com/16210/l0110s0100blm18a-16210006.pdf?src-supplier=Future+Electronics, Core Material=Ferrite, DC Current=500mA, Depth=0.8mm, Height=0.8mm, Impedance=600R, Lead Free="Lead Free", Length=1.6mm, Material=Steel, Max Current Rating=500mA, Max DC Current=500mA, Military Standard=Not, Number of Circuits=1, Number of Lines=1, Number of Pins=2, Packaging="Tape and Reel", Pricing 1="1 = 0,10000, 10 = 0,07900, 25 = 0,07200, 50 = 0,06480, 100 = 0,04760, 250 = 0,03460, 500 = 0,03170, 1000 = 0,02738 (USD)", Radiation Hardening=No, REACH SVHC="No SVHC", RoHS=Yes, Shielding=Unshielded, Stock 1=1151376, Supplier 1=Digi-Key, Termination=SMD/SMT, Test Frequency=100MHz, Weight=7.1E-05oz, Width=0.8mm
Fid1 Fid2 Fid3 Fid4: "Fiducial Mark", Part Number=Fid-Mark, Artikkelnr Noca=N.A., Artikkelnr Simpro=N.A., Footprint Doc=Fiducial, LatestRevisionDate=2009-12-12, Pin Count=1, Published=2009-12-12, Publisher="Nordic Semiconductor"
HOLDER1: library part "LENS HOLDER", Manufacturer Part Number=PT-LH001P, Pricing 1="1 = 3,00 (USD)", Supplier=m12lenses, Supplier Link=http://www.m12lenses.com/M12-Lens-Holder-Plastic-p/pt-lh001p.htm, Supplier part number=PT-LH001P
IC1: library part "ON SEMI MT9M114", "1/6-inch 720p High-Definition (HD) System-On-a-Chip (SOC) Digital Image Sensor", Manufacturer="ON Semiconductor", Manufacturer Part Number=MT9M114EBLSTCZ-CR1, Supplier Part Number 1=MT9M114EBLSTCZ-CR1-ND, Lead Free="Lead Free", Pricing 1="1 = 7,38000, 5 = 6,47200, 10 = 5,82500, 25 = 5,17800, 50 = 4,78960, 100 = 4,14240, 500 = 3,88350, 1000 = 3,62460 (USD)", RoHS=No, Stock 1=425, Supplier 1=Digi-Key
IC2 IC3: library part "MICROCHIP MIC5353", "Integrated Circuit", Manufacturer=Microchip, Manufacturer Part Number=MIC5353YMT-TR, Supplier Part Number 1=576-3681-1-ND, ComponentLink1Description=http://www.farnell.com/datasheets/2245202.pdf?src-supplier=Farnell, ComponentLink1URL=http://www.farnell.com/datasheets/2245202.pdf?src-supplier=Farnell, ComponentLink2Description=http://www.microchip.com/mymicrochip/filehandler.aspx?ddocname=en579989&src-supplier=Digi-Key, ComponentLink2URL=http://www.microchip.com/mymicrochip/filehandler.aspx?ddocname=en579989&src-supplier=Digi-Key, ComponentLink3Description=http://www.farnell.com/datasheets/1692673.pdf?src-supplier=Element14, ComponentLink3URL=http://www.farnell.com/datasheets/1692673.pdf?src-supplier=Element14, ComponentLink4Description=https://datasheet.ciiva.com/2049/mic5353-2049344.pdf?src-supplier=Digi-Key, ComponentLink4URL=https://datasheet.ciiva.com/2049/mic5353-2049344.pdf?src-supplier=Digi-Key, ComponentLink5Description=https://datasheet.ciiva.com/2049/mic5353-2049342.pdf?src-supplier=Digi-Key, ComponentLink5URL=https://datasheet.ciiva.com/2049/mic5353-2049342.pdf?src-supplier=Digi-Key, ComponentLink6Description=https://datasheet.ciiva.com/2049/mic5353-2049343.pdf?src-supplier=Digi-Key, ComponentLink6URL=https://datasheet.ciiva.com/2049/mic5353-2049343.pdf?src-supplier=Digi-Key, Pricing 1="1 = 0,34000, 25 = 0,28000, 100 = 0,26000 (USD)", RoHS=Yes, Stock 1=1004, Supplier 1=Digi-Key
IC4 IC5: library part "Panasonic AMG8833", "The Panasonic Electric Works' Grid Eye is a thermopile-type infrared sensor with digital communication. Using advanced MEMS technology, the Grid Eye monitors the quantity of infrared rays for 64 pixels of data. This page describes the internal memory structure that can be accessed through an I2C interface.", Case/Package=SMD/SMT, Manufacturer=Panasonic, Manufacturer Part Number=AMG8833, Max Operating Temperature=80°C, Min Operating Temperature=0°C, Supplier Part Number 1=P19002CT-ND, ComponentLink1Description=https://media.digikey.com/pdf/Data%20Sheets/Panasonic%20Sensors%20PDFs/Grid-EYE_AMG88.pdf?src-supplier=Digi-Key, ComponentLink1URL=https://media.digikey.com/pdf/Data%20Sheets/Panasonic%20Sensors%20PDFs/Grid-EYE_AMG88.pdf?src-supplier=Digi-Key, ComponentLink2Description=http://industrial.panasonic.com/cdbs/www-data/pdf/ADI8000/ADI8000C66.pdf?src-supplier=Newark, ComponentLink2URL=http://industrial.panasonic.com/cdbs/www-data/pdf/ADI8000/ADI8000C66.pdf?src-supplier=Newark, ComponentLink3Description=http://industrial.panasonic.com/cdbs/www-data/pdf/ADI8000/ADI8000C66.pdf?src-supplier=Farnell, ComponentLink3URL=http://industrial.panasonic.com/cdbs/www-data/pdf/ADI8000/ADI8000C66.pdf?src-supplier=Farnell, Output Type=I2C, Packaging="Tape and Reel", Pricing 1="1 = 32,50000, 5 = 31,02400, 10 = 28,06900, 25 = 25,85280, 50 = 22,89820 (USD)", RoHS=Yes, Sensing Method="Infrared (IR)", Stock 1=207, Supplier 1=Digi-Key
IC6 IC7: library part BSS138-7-F, "MOSFET N-CH 50V 200MA SOT23-3", Manufacturer=Nexperia, Manufacturer Part Number=BSS138P,215, Supplier Part Number 1=1727-1142-1-ND, ComponentLink1Description=Datasheet, ComponentLink1URL=https://www.diodes.com/assets/Datasheets/ds30144.pdf, ComponentLink2Description="DigiKey Link", ComponentLink2URL=http://digikey.com/product-detail/en/diodes-incorporated/BSS138-7-F/BSS138-FDICT-ND/717843, ComponentLink3Description=http://www.farnell.com/datasheets/923164.pdf?src-supplier=Farnell, ComponentLink3URL=http://www.farnell.com/datasheets/923164.pdf?src-supplier=Farnell, ComponentLink4Description=https://www.mouser.com/ds/2/302/BSS138P-114022.pdf?src-supplier=Mouser, ComponentLink4URL=https://www.mouser.com/ds/2/302/BSS138P-114022.pdf?src-supplier=Mouser, ComponentLink5Description=https://assets.nexperia.com/documents/data-sheet/BSS138P.pdf?src-supplier=Digi-Key, ComponentLink5URL=https://assets.nexperia.com/documents/data-sheet/BSS138P.pdf?src-supplier=Digi-Key, ComponentLink6Description=http://www.farnell.com/datasheets/923164.pdf?src-supplier=Newark, ComponentLink6URL=http://www.farnell.com/datasheets/923164.pdf?src-supplier=Newark, Pricing 1="1 = 0,16000, 10 = 0,14400, 25 = 0,13760, 100 = 0,06050, 250 = 0,05808, 500 = 0,04752, 1000 = 0,03300 (USD)", RoHS=No, Stock 1=720934, Supplier 1=Digi-Key
J2: library part FPC-22, "Connector", Contact Resistance=30mR, Current Rating=500mA, Flammability Rating="UL94 V-0", Housing Color=Black, Insulation Resistance=100MR, Manufacturer="Amphenol FCI", Manufacturer Part Number=SFV22R-2STE1HLF, Max Operating Temperature=105°C, Max Voltage Rating (AC)=50V, Min Operating Temperature=-55°C, Package Quantity=3000, Supplier Part Number 1=609-4319-1-ND, Actuator Material=Glass,Polyphenylene, ComponentLink1Description=https://datasheet.ciiva.com/670/10112793-670003.pdf?src-supplier=Digi-Key, ComponentLink1URL=https://datasheet.ciiva.com/670/10112793-670003.pdf?src-supplier=Digi-Key, ComponentLink2Description=https://datasheet.ciiva.com/670/10112793-670004.pdf?src-supplier=Digi-Key, ComponentLink2URL=https://datasheet.ciiva.com/670/10112793-670004.pdf?src-supplier=Digi-Key, ComponentLink3Description=https://datasheet.ciiva.com/13704/10112793-13704492.pdf?src-supplier=Mouser, ComponentLink3URL=https://datasheet.ciiva.com/13704/10112793-13704492.pdf?src-supplier=Mouser, ComponentLink4Description=https://datasheet.ciiva.com/670/10112793-670005.pdf?src-supplier=Digi-Key, ComponentLink4URL=https://datasheet.ciiva.com/670/10112793-670005.pdf?src-supplier=Digi-Key, ComponentLink5Description=https://datasheet.ciiva.com/10368/10112793-10368190.pdf?src-supplier=Avnet, ComponentLink5URL=https://datasheet.ciiva.com/10368/10112793-10368190.pdf?src-supplier=Avnet, Contact Location=Top, Contact Material=Bronze, Contact Plating=Tin, Depth=4.9mm, Housing Material=Polymer, Length=16.5mm, Max Current Rating=500mA, Mount="Surface Mount", Number of Contacts=22, Number of Positions=22, Number of Rows=1, Orientation="Right Angle", Packaging="Tape and Reel", Pitch=0.5mm, Pricing 1="1 = 0,79000, 10 = 0,74300, 25 = 0,66840, 50 = 0,59420, 100 = 0,56950, 250 = 0,52000, 500 = 0,49522, 1000 = 0,40856 (USD)", Radiation Hardening=No, RoHS=Yes, Stock 1=2152, Supplier 1=Digi-Key, Termination=Solder, Voltage Rating=50V, Wire/Cable Type=Straight
Logo1 Logo2: library part Logo, "Schematic symbol for Logo"
R3 R4: library part Resistor_Chip, "Ceramic, SMT Capacitor", Case/Package=0603, Case Code (Metric)=1608, Manufacturer=Yageo, Manufacturer Part Number=RC0603FR-071K5L, Max Operating Temperature=155°C, Max Power Dissipation=100mW, Min Operating Temperature=-55°C, Package Quantity=1, Supplier Part Number 1=311-1.50KHRCT-ND, Temperature Coefficient=100ppm/°C, Tolerance=1%, Voltage Rating=50V, Case Code (Imperial)=0603, ComponentLink1Description=https://datasheet.ciiva.com/2454/pyu-r-int-thick-7-2454513.pdf?src-supplier=Digi-Key, ComponentLink1URL=https://datasheet.ciiva.com/2454/pyu-r-int-thick-7-2454513.pdf?src-supplier=Digi-Key, ComponentLink2Description=https://datasheet.ciiva.com/2454/pyu-r-int-thick-7-2454514.pdf?src-supplier=Digi-Key, ComponentLink2URL=https://datasheet.ciiva.com/2454/pyu-r-int-thick-7-2454514.pdf?src-supplier=Digi-Key, ComponentLink3Description=https://datasheet.ciiva.com/2454/pyu-r-int-thick-7-2454515.pdf?src-supplier=Digi-Key, ComponentLink3URL=https://datasheet.ciiva.com/2454/pyu-r-int-thick-7-2454515.pdf?src-supplier=Digi-Key, ComponentLink4Description=https://datasheet.ciiva.com/46440/1868787-46440895.pdf?src-supplier=Element14, ComponentLink4URL=https://datasheet.ciiva.com/46440/1868787-46440895.pdf?src-supplier=Element14, Composition="Thick Film", Depth=0.8mm, Features="Moisture Resistant", Height=0.022inch, Lead Free="Lead Free", Length=0.063inch, Military Standard=Not, Number of Pins=2, Number of Terminations=2, Packaging="Tape and Reel", Power Rating=100mW, Pricing 1="1 = 0,10000, 10 = 0,02300, 100 = 0,00940, 1000 = 0,00421, 2500 = 0,00366 (USD)", REACH SVHC="No SVHC", Resistance=1.5kR, RoHS=Yes, Stock 1=4073514, Supplier 1=Digi-Key, Termination=SMD/SMT, Voltage Rating (DC)=50V, Width=0.031inch
R5 R6 R7 R8 R11 R12 R13 R14 R15 R17 R18 R29 R30: library part Resistor_Chip, "Ceramic, SMT Capacitor", Case/Package=0603, Case Code (Metric)=1608, Manufacturer="Stackpole Electronics", Manufacturer Part Number=RNCP0603FTD10K0, Max Operating Temperature=155°C, Max Power Dissipation=125mW, Min Operating Temperature=-55°C, Supplier Part Number 1=RNCP0603FTD10K0CT-ND, Temperature Coefficient=100ppm/°C, Tolerance=1%, Case Code (Imperial)=0603, Composition="Thin Film", Contact Plating=Matte,Tin, Features="Anti-Sulfur,Moisture Resistant", Height=0.02inch, Lead Free="Lead Free", Length=0.059inch, Mount="Surface Mount", Number of Terminations=2, Packaging="Tape and Reel", Pricing 1="1 = 0,10000, 10 = 0,06700, 100 = 0,02730, 1000 = 0,01224, 2500 = 0,01063 (USD)", Radiation Hardening=No, Resistance=10kR, RoHS=Yes, Stock 1=183083, Supplier 1=Digi-Key, Width=0.031inch
  R8: NC=NC
R9: library part Resistor_Chip, "Ceramic, SMT Capacitor", Case/Package=0603, Case Code (Metric)=1608, Manufacturer=Yageo, Manufacturer Part Number=RC0603FR-0714KL, Max Operating Temperature=155°C, Max Power Dissipation=100mW, Min Operating Temperature=-55°C, Package Quantity=1, Supplier Part Number 1=311-14.0KHRCT-ND, Temperature Coefficient=100ppm/°C, Tolerance=1%, Voltage Rating=75V, Voltage Rating (DC)=50V, Case Code (Imperial)=0603, ComponentLink1Description=https://datasheet.ciiva.com/15189/getdatasheetpartid-325152-15189610.pdf?src-supplier=Verical, ComponentLink1URL=https://datasheet.ciiva.com/15189/getdatasheetpartid-325152-15189610.pdf?src-supplier=Verical, ComponentLink2Description=https://datasheet.ciiva.com/2455/pyu-r-int-thick-7-2455089.pdf?src-supplier=Digi-Key, ComponentLink2URL=https://datasheet.ciiva.com/2455/pyu-r-int-thick-7-2455089.pdf?src-supplier=Digi-Key, ComponentLink3Description=https://datasheet.ciiva.com/2455/pyu-r-int-thick-7-2455090.pdf?src-supplier=Digi-Key, ComponentLink3URL=https://datasheet.ciiva.com/2455/pyu-r-int-thick-7-2455090.pdf?src-supplier=Digi-Key, ComponentLink4Description=https://datasheet.ciiva.com/2455/pyu-r-int-thick-7-2455091.pdf?src-supplier=Digi-Key, ComponentLink4URL=https://datasheet.ciiva.com/2455/pyu-r-int-thick-7-2455091.pdf?src-supplier=Digi-Key, Composition="Thick Film", Depth=0.8mm, Features="Moisture Resistant", Height=0.022inch, Lead Free="Lead Free", Length=1.6mm, Military Standard=Not, Number of Terminations=2, Packaging="Tape and Reel", Power Rating=100mW, Pricing 1="1 = 0,10000, 10 = 0,02300, 100 = 0,00940, 1000 = 0,00421, 2500 = 0,00366 (USD)", Resistance=14kR, RoHS=Yes, Stock 1=622097, Supplier 1=Digi-Key, Termination=SMD/SMT, Weight=7.1E-05oz, Width=0.031inch
R10: library part Resistor_Chip, "Ceramic, SMT Capacitor", Case/Package=0603, Case Code (Metric)=1608, Manufacturer=Yageo, Manufacturer Part Number=RC0603FR-074K42L, Max Operating Temperature=155°C, Max Power Dissipation=100mW, Min Operating Temperature=-55°C, Package Quantity=1, Supplier Part Number 1=311-4.42KHRCT-ND, Temperature Coefficient=100ppm/°C, Tolerance=1%, Voltage Rating=75V, Voltage Rating (DC)=50V, Case Code (Imperial)=0603, ComponentLink1Description=https://datasheet.ciiva.com/15189/getdatasheetpartid-325152-15189610.pdf?src-supplier=Verical, ComponentLink1URL=https://datasheet.ciiva.com/15189/getdatasheetpartid-325152-15189610.pdf?src-supplier=Verical, ComponentLink2Description=https://datasheet.ciiva.com/2455/pyu-r-int-thick-7-2455089.pdf?src-supplier=Digi-Key, ComponentLink2URL=https://datasheet.ciiva.com/2455/pyu-r-int-thick-7-2455089.pdf?src-supplier=Digi-Key, ComponentLink3Description=https://datasheet.ciiva.com/2455/pyu-r-int-thick-7-2455090.pdf?src-supplier=Digi-Key, ComponentLink3URL=https://datasheet.ciiva.com/2455/pyu-r-int-thick-7-2455090.pdf?src-supplier=Digi-Key, ComponentLink4Description=https://datasheet.ciiva.com/2455/pyu-r-int-thick-7-2455091.pdf?src-supplier=Digi-Key, ComponentLink4URL=https://datasheet.ciiva.com/2455/pyu-r-int-thick-7-2455091.pdf?src-supplier=Digi-Key, ComponentLink5Description=https://datasheet.ciiva.com/2455/pyu-r-int-thick-7-2455035.pdf?src-supplier=Digi-Key, ComponentLink5URL=https://datasheet.ciiva.com/2455/pyu-r-int-thick-7-2455035.pdf?src-supplier=Digi-Key, ComponentLink6Description=https://datasheet.ciiva.com/2455/pyu-r-int-thick-7-2455036.pdf?src-supplier=Digi-Key, ComponentLink6URL=https://datasheet.ciiva.com/2455/pyu-r-int-thick-7-2455036.pdf?src-supplier=Digi-Key, ComponentLink7Description=https://datasheet.ciiva.com/2455/pyu-r-int-thick-7-2455037.pdf?src-supplier=Digi-Key, ComponentLink7URL=https://datasheet.ciiva.com/2455/pyu-r-int-thick-7-2455037.pdf?src-supplier=Digi-Key, ComponentLink8Description=https://datasheet.ciiva.com/15189/getdatasheetpartid-406810-15189757.pdf?src-supplier=Verical, ComponentLink8URL=https://datasheet.ciiva.com/15189/getdatasheetpartid-406810-15189757.pdf?src-supplier=Verical, Composition="Thick Film", Depth=0.8mm, Features="Moisture Resistant", Height=0.022inch, Lead Free="Lead Free", Length=1.6mm, Military Standard=Not, Number of Terminations=2, Packaging="Tape and Reel", Power Rating=100mW, Pricing 1="1 = 0,10000, 10 = 0,02300, 100 = 0,00940, 1000 = 0,00421, 2500 = 0,00366 (USD)", Resistance=4.42kR, RoHS=Yes, Stock 1=131368, Supplier 1=Digi-Key, Termination=SMD/SMT, Weight=7.1E-05oz, Width=0.8mm
R21 R22: library part Resistor_Chip, "Ceramic, SMT Capacitor", Case/Package=0603, Case Code (Metric)=1608, Manufacturer=Yageo, Manufacturer Part Number=RC0603JR-0720RL, Max Operating Temperature=155°C, Max Power Dissipation=100mW, Min Operating Temperature=-55°C, Package Quantity=1, Supplier Part Number 1=311-20GRCT-ND, Temperature Coefficient=100ppm/°C, Tolerance=5%, Voltage Rating=75V, Voltage Rating (DC)=50V, Case Code (Imperial)=0603, ComponentLink1Description=https://datasheet.ciiva.com/2453/pyu-r-int-thick-7-2453211.pdf?src-supplier=Digi-Key, ComponentLink1URL=https://datasheet.ciiva.com/2453/pyu-r-int-thick-7-2453211.pdf?src-supplier=Digi-Key, ComponentLink2Description=https://datasheet.ciiva.com/2453/pyu-r-int-thick-7-2453212.pdf?src-supplier=Digi-Key, ComponentLink2URL=https://datasheet.ciiva.com/2453/pyu-r-int-thick-7-2453212.pdf?src-supplier=Digi-Key, ComponentLink3Description=https://datasheet.ciiva.com/2453/pyu-r-int-thick-7-2453213.pdf?src-supplier=Digi-Key, ComponentLink3URL=https://datasheet.ciiva.com/2453/pyu-r-int-thick-7-2453213.pdf?src-supplier=Digi-Key, Composition="Thick Film", Depth=0.8mm, Features="Moisture Resistant", Height=0.022inch, Lead Free="Lead Free", Length=1.6mm, Military Standard=Not, Number of Terminations=2, Packaging="Tape and Reel", Power Rating=100mW, Pricing 1="1 = 0,10000, 10 = 0,01900, 100 = 0,00770, 1000 = 0,00347, 2500 = 0,00301 (USD)", REACH SVHC=Unknown, Resistance=20R, RoHS=Yes, Stock 1=99734, Supplier 1=Digi-Key, Termination=SMD/SMT, Weight=7.1E-05oz, Width=0.8mm
R25 R26: library part Resistor_Chip, "Ceramic, SMT Capacitor", Case/Package=0603, Case Code (Metric)=1608, Manufacturer=Yageo, Manufacturer Part Number=RC0603FR-0710RL, Max Operating Temperature=155°C, Min Operating Temperature=-55°C, Power Rating=100mW, Supplier Part Number 1=311-10.0HRCT-ND, Temperature Coefficient=200ppm/°C, Tolerance=1%, Voltage Rating=50V, Case Code (Imperial)=0603, ComponentLink1Description=https://datasheet.ciiva.com/11808/0900766b80f96399-11808140.pdf?src-supplier=RSComponents, ComponentLink1URL=https://datasheet.ciiva.com/11808/0900766b80f96399-11808140.pdf?src-supplier=RSComponents, ComponentLink2Description=https://datasheet.ciiva.com/7746/443971-7746245.pdf?src-supplier=Element14, ComponentLink2URL=https://datasheet.ciiva.com/7746/443971-7746245.pdf?src-supplier=Element14, ComponentLink3Description=https://datasheet.ciiva.com/28386/pyu-rc0603-51-rohs-l-4-28386637.pdf?src-supplier=Avnet+Europe, ComponentLink3URL=https://datasheet.ciiva.com/28386/pyu-rc0603-51-rohs-l-4-28386637.pdf?src-supplier=Avnet+Europe, ComponentLink4Description=https://datasheet.ciiva.com/8891/pyu-rc0603-51-rohs-l-4-8891285.pdf?src-supplier=Avnet, ComponentLink4URL=https://datasheet.ciiva.com/8891/pyu-rc0603-51-rohs-l-4-8891285.pdf?src-supplier=Avnet, Composition="Thick Film", Contact Plating=Tin,Matte, Depth=0.8mm, Height=0.45mm, Lead Free="Lead Free", Length=1.6mm, Military Standard=Not, Number of Pins=2, Packaging="Tape and Reel", Pricing 1="1 = 0,10000, 10 = 0,04600, 100 = 0,01870, 1000 = 0,00840, 2500 = 0,00729 (USD)", Radiation Hardening=No, REACH SVHC="No SVHC", Resistance=10R, RoHS=Yes, Stock 1=10914948, Supplier 1=Digi-Key, Termination=SMD/SMT, Voltage Rating (DC)=50V, Width=0.8mm
R27 R28: library part Resistor_Chip, "Ceramic, SMT Capacitor", Case/Package=0603, Case Code (Metric)=1608, Manufacturer=Yageo, Manufacturer Part Number=RC0603FR-07220RL, Max Operating Temperature=155°C, Max Power Dissipation=100mW, Min Operating Temperature=-55°C, Package Quantity=1, Supplier Part Number 1=311-220HRCT-ND, Temperature Coefficient=100ppm/°C, Tolerance=1%, Voltage Rating=50V, Case Code (Imperial)=0603, ComponentLink1Description=https://datasheet.ciiva.com/2453/pyu-r-int-thick-7-2453973.pdf?src-supplier=Digi-Key, ComponentLink1URL=https://datasheet.ciiva.com/2453/pyu-r-int-thick-7-2453973.pdf?src-supplier=Digi-Key, ComponentLink2Description=https://datasheet.ciiva.com/2453/pyu-r-int-thick-7-2453974.pdf?src-supplier=Digi-Key, ComponentLink2URL=https://datasheet.ciiva.com/2453/pyu-r-int-thick-7-2453974.pdf?src-supplier=Digi-Key, ComponentLink3Description=https://datasheet.ciiva.com/2453/pyu-r-int-thick-7-2453975.pdf?src-supplier=Digi-Key, ComponentLink3URL=https://datasheet.ciiva.com/2453/pyu-r-int-thick-7-2453975.pdf?src-supplier=Digi-Key, ComponentLink4Description=https://datasheet.ciiva.com/7746/1738695-7746300.pdf?src-supplier=Element14, ComponentLink4URL=https://datasheet.ciiva.com/7746/1738695-7746300.pdf?src-supplier=Element14, ComponentLink5Description=https://datasheet.ciiva.com/7746/1738695-7746301.pdf?src-supplier=Element14, ComponentLink5URL=https://datasheet.ciiva.com/7746/1738695-7746301.pdf?src-supplier=Element14, Composition="Thick Film", Depth=0.8mm, Features="Moisture Resistant", Height=0.022inch, Lead Free="Lead Free", Length=1.6mm, Military Standard=Not, Number of Pins=2, Number of Terminations=2, Packaging="Tape and Reel", Power Rating=100mW, Pricing 1="1 = 0,10000, 10 = 0,02300, 100 = 0,00940, 1000 = 0,00421, 2500 = 0,00366 (USD)", REACH SVHC="No SVHC", Resistance=220R, RoHS=Yes, Stock 1=5261609, Supplier 1=Digi-Key, Termination=SMD/SMT, Voltage Rating (DC)=50V, Width=0.031inch
Y1: library part ASD1-1.544MHZ-EC-T, "OSC XO 1.544MHZ CMOS SMD", Frequency Stability=±25ppm, Manufacturer="ECS Inc.", Manufacturer Part Number=ECS-3225MV-240-CN-TR, Supplier Part Number 1=XC2884CT-ND, Voltage - Supply="1.62V ~ 3.63V", Base Resonator=Crystal, ComponentLink1Description=Datasheet, ComponentLink1URL=http://www.abracon.com/Oscillators/ASDseries.pdf, ComponentLink2Description="Digi-Key Listing", ComponentLink2URL=https://www.digikey.com/product-detail/en/ASD1-1.544MHZ-EC-T/535-9579-2-ND/1236896, ComponentLink3Description=https://www.ecsxtal.com/store/pdf/ECS-3225MV.pdf?src-supplier=Digi-Key, ComponentLink3URL=https://www.ecsxtal.com/store/pdf/ECS-3225MV.pdf?src-supplier=Digi-Key, Frequency=24MHz, Function=Enable/Disable, Output=HCMOS, Packaging="Cut Tape (CT)", Pricing 1="1 = 0,92000, 10 = 0,81700, 50 = 0,76380, 100 = 0,67510, 500 = 0,63954 (USD)", RoHS=No, Series=ECS-3225MV, Stock 1=1655, Supplier 1=Digi-Key, Type="XO (Standard)"

## Free pads (board coordinates)
  round 4 hole 2.5: ""(-25.15,-3.075) ""(25.15,-3.425)

## Via types
v1: diameter 0.3, hole 0.2, L1 to L6, tented both sides, 82 vias
v2: diameter 0.45, hole 0.2, L1 to L6, tented both sides, 77 vias
v3: diameter 0.5, hole 0.3, L1 to L6, tented both sides, 1 vias
v4: diameter 0.6, hole 0.3, L1 to L6, tented both sides, 1 vias

## Nets (pads, with @x,y where several pads share a name; then routed paths per layer and width w, separated by ;. In a path a pad name is that pad's centre, name@x,y a point inside that pad or via, vN(x,y) a via of type N, cw(c..) or ccw(c..) an arc to the next point about the centre after c; other vN are vias at no path point)
1v8: C26.2 FB3.2 FB5.2 IC3.4 R10.2 | length 40.6
  L1 w0.2: v2(-6.275,-0.75) FB5.2 ; FB3.2 v2(6.475,-0.7) ; v2(15.375,0.8) R10.2 16.3,1.175 17.15,2.025 C26.2 17.5,2.425 17.85,2.775 17.9,2.775 18.05,2.925 IC3.4
  L2 w0.2: v2(-6.275,-0.75) -6.55,-0.475 -6.55,3.146 -4.046,5.65 4.557,5.65 6.7,3.507 6.7,-0.475 v2(6.475,-0.7) 7.65,-1.875 12.7,-1.875 v2(15.375,0.8)
3v: C22.2 C24.2 C29.1 C30.1 C31.2 C32.2 D1.1 D2.1 FB2.2 FB4.2 FB6.2 IC2.4 IC3.1 IC3.3 IC4.9 IC4.13 IC5.9 IC5.13 R9.2 R13.2 R14.2 R15.2 R17.2 R18.2 | length 30.8
  L1 w0.2: v2(-22.6,-5.8) R13.2 ; v2(-22.6,-4.225) R14.2 ; v2(-22.6,-2.65) R15.2 ; IC2.4 -17.9,-0.175 -17.5,-0.575 C24.2 v2(-18.225,-0.625) ; R9.2 -16.3,2.575 -15.725,2.575 v2(-15.3,3) ; v2(-15.335,-5.4) -16.125,-5.4 C29.1 C31.2 v2(-15.25,-6.95) ; v2(-4.75,-6.15) FB6.2 ; FB2.2 v2(0.175,8.1) ; FB4.2 v2(3.35,8.1) ; v2(15.325,-7.05) R17.2 R18.2 ; v2(19.4,-5.175) 19.65,-5.425 C32.2 C30.1 v2(19.5,-7) ; v2(20.625,1.45) IC3.1 ; IC3.3 21.575,2.925 C22.2 22.279,2.579 22.279,2.754 v2(22.65,3.125)
  L6 w0.2: v2(-15.335,-5.4) IC4.13 ; IC4.9 v2(-13.1,-0.83) ; v2(-12.175,3.525) D2.1 ; v2(12.275,3.5) D1.1 ; v2(19.5,-7) 20.76,-5.74 IC5.13
5V: C21.2 IC2.3 J2.1 | length 27.3
  L1 w0.2: C21.2 -22.05,0.4 -21.475,-0.175 IC2.3
  L1 w0.3: v2(-22.625,-1.425) -22.1,-0.9 C21.2 ; v2(-6.3,-8.775) -5.25,-9.825 J2.1
  L2 w0.3: v2(-22.625,-1.425) -21.263,-2.788 -21.263,-6.263 -18.75,-8.775 v2(-6.3,-8.775)
AVDD: C5.2 C6.2 C7.2 FB4.1 IC1.A1 IC1.B2 | length 11
  L1 w0.3: C5.2 C5.2@1.8,4.175 ; v4(2.55,4.8) 2.493,4.743 2.368,4.743 C5.2@1.8,4.175 ; FB4.1 C5.2@1.8,4.175
  L6 w0.1: IC1.B2 1.608,1.412 1.608,4.033 C7.2 ; IC1.A1 1.876,2.701 C6.2
  L6 w0.3: C7.2 2.375,4.8 2.725,4.8 C6.2
CAM_GND: C1.1 C2.1 C3.1 C4.1 C5.1 C6.1 C7.1 C9.1 C10.1 C11.1 C12.1 C13.1 C14.1 C15.1 C16.1 C17.1 C18.1 C19.1 C20.1 FB1.1 IC1.B1 IC1.B6 IC1.C2 IC1.C3 IC1.C4 IC1.D7 IC1.E4 IC1.E7 IC1.F3 IC1.F4 IC1.G4 IC1.G5 IC1.G7 IC1.G8 R8.1 | length 24.5
  L1 w0.1: FB1.1 v1(-5.275,6.95) ; v1(-6,-2.325) C1.1 ; C17.1 C17.1@0.025,-5.35 ; C5.1 v1(1.75,6.425) ; R8.1 v1(6.225,2.475) ; C14.1@5.575,-2.275 v1(6.25,-2.275) ; C9.1@5.575,0.875 v1(6.25,0.875)
  L1 w0.5: C3.1 C4.1 C17.1 ; C17.1@0.025,-5.35 v3(0.775,-6.1)
  L6 w0.1: v1@-6.125,0.85 C13.1 ; v1(-6.125,2.425) C19.1 ; v1(-6.075,-1.575) C2.1 ; v1(-6.05,0.05) -5.3,-0.7 C18.1 ; C12.1 v1(-2.975,6.325) ; v1@-2.013,-1.689 IC1.G8 ; v1@-1.493,-1.689 IC1.G7 ; v1@-1.493,-0.649 IC1.E7 ; v1@-1.493,-0.129 IC1.D7 ; C20.1 v1(-1.4,6.3) ; v1@-0.992,0.892 IC1.B6 ; v1(-0.525,6.225) C11.1 ; v1@-0.453,-1.689 IC1.G5 ; IC1.G4 v1@0.565,-1.689 ; IC1.F4 v1@0.565,-1.169 ; IC1.E4 v1@0.565,-0.649 ; IC1.C4 v1@0.565,0.391 ; IC1.F3 v1@1.085,-1.169 ; IC1.C3 v1@1.085,0.391 ; v1(1.15,6.125) C7.1 C7.1@1.7,5.525 ; IC1.C2 v1@1.605,0.889 ; IC1.B1 v1@2.125,1.409 ; C16.1@5.575,-2.275 v1(6.25,-2.275) ; C10.1 5.575,-0.75 v1(6.35,-1.525) ; C15.1@5.575,0.875 v1(6.25,0.875)
  L6 w0.2: C6.1 3.75,5.525 v1(4.275,5)
  other v1: -2.019,-1.684 -0.459,-1.684 0.56,-1.695 -1.425,-1.675 0.56,-1.175 1.08,-1.175 -1.499,-0.644 0.56,-0.655 -1.499,-0.124 0.56,0.385 1.08,0.385 -6.125,0.85 1.611,0.884 -0.954,0.953 2.131,1.404
CAMERA_LIGHT: J2.21 R27.1 R28.1 | length 52.2
  L1 w0.1: v1(-9.075,3.1) R28.1 ; J2.21 v1(4.75,-9.55) ; v1(8.8,3.075) R27.1
  L6 w0.1: v1(4.75,-9.55) 4.125,-9.55 1.489,-12.186 -4.897,-12.186 -7.604,-9.479 -7.604,1.629 v1(-9.075,3.1) -9.075,3.7 -5.45,7.325 4.55,7.325 v1(8.8,3.075)
CONFIG: IC1.D1 R7.2 R8.2 | length 5.2
  L1 w0.1: v1(2.7,0) 2.7,1.625 v2(3.5,2.425) 4.2,2.425 R8.2
  L6 w0.1: IC1.D1 2.58,0.12 v1(2.7,0) ; v2(3.5,2.425) 3.55,2.475 R7.2
D0: IC1.B7 J2.2 | length 17.7
  L1 w0.1: J2.2 v1(-4.75,-9.125)
  Layer 1 w0.1: v1(-4.75,-9.125) -4.475,-8.85 -4.369,-8.744 cw(c-4.298,-8.673) -4.369,-8.602 -4.298,-8.532 cw(c-4.228,-8.603) -4.157,-8.532 -3.933,-8.756 ccw(c-3.826,-8.65) -3.72,-8.756 ccw(c-3.826,-8.65) -3.72,-8.544 -3.839,-8.426 cw(c-3.733,-8.32) -3.839,-8.214 -3.733,-8.108 -3.6,-7.975 -3.6,-7.825 -3.6,-7.586 ccw(c-3.661,-7.586) -3.661,-7.525 cw(c-3.661,-7.375) -3.811,-7.375 cw(c-3.661,-7.375) -3.661,-7.225 -3.6,-7.225 ccw(c-3.6,-7.125) -3.5,-7.125 -3.5,-7.025 ccw(c-3.6,-7.025) -3.6,-6.925 -3.661,-6.925 cw(c-3.661,-6.775) -3.811,-6.775 cw(c-3.661,-6.775) -3.661,-6.625 -3.6,-6.625 ccw(c-3.6,-6.525) -3.5,-6.525 -3.5,-6.425 ccw(c-3.6,-6.425) -3.6,-6.325 -3.661,-6.325 cw(c-3.661,-6.175) -3.811,-6.175 cw(c-3.661,-6.175) -3.661,-6.025 -3.6,-6.025 ccw(c-3.6,-5.925) -3.5,-5.925 -3.5,-5.825 ccw(c-3.6,-5.825) -3.6,-5.725 -3.661,-5.725 cw(c-3.661,-5.575) -3.811,-5.575 cw(c-3.661,-5.575) -3.661,-5.425 -3.6,-5.425 ccw(c-3.6,-5.325) -3.5,-5.325 -3.5,-5.225 ccw(c-3.6,-5.225) -3.6,-5.125 -3.661,-5.125 cw(c-3.661,-4.975) -3.811,-4.975 cw(c-3.661,-4.975) -3.661,-4.825 -3.6,-4.825 ccw(c-3.6,-4.725) -3.5,-4.725 -3.5,-4.625 ccw(c-3.6,-4.625) -3.6,-4.525 -3.661,-4.525 cw(c-3.661,-4.375) -3.811,-4.375 cw(c-3.661,-4.375) -3.661,-4.225 -3.6,-4.225 ccw(c-3.6,-4.125) -3.5,-4.125 -3.5,-4.025 ccw(c-3.6,-4.025) -3.6,-3.925 -3.661,-3.925 cw(c-3.661,-3.775) -3.811,-3.775 cw(c-3.661,-3.775) -3.661,-3.625 -3.6,-3.625 ccw(c-3.6,-3.525) -3.5,-3.525 -3.5,-3.425 ccw(c-3.6,-3.425) -3.6,-3.325 -3.661,-3.325 cw(c-3.661,-3.175) -3.811,-3.175 cw(c-3.661,-3.175) -3.661,-3.025 -3.6,-3.025 ccw(c-3.6,-2.925) -3.5,-2.925 -3.5,-2.825 ccw(c-3.6,-2.825) -3.6,-2.725 -3.661,-2.725 cw(c-3.661,-2.575) -3.811,-2.575 cw(c-3.661,-2.575) -3.661,-2.425 ccw(c-3.661,-2.364) -3.6,-2.364 -3.6,-2.125 -3.6,-1.95 -2.644,-0.994 -2.644,0.264 -1.955,0.953 v1(-1.474,0.953)
  L6 w0.1: v1(-1.474,0.953) -1.462,0.953 -1.255,1.16 IC1.B7
D1: IC1.A7 J2.3 | length 17.9
  L1 w0.1: J2.3 v1(-4.25,-9.5)
  Layer 1 w0.1: v1(-4.25,-9.5) -4.784,-9.5 -5.039,-9.245 -5.039,-8.734 -4.175,-7.87 -4.175,-4.275 ccw(c-4.325,-4.275) -4.325,-4.125 -4.525,-4.125 cw(c-4.525,-3.975) -4.675,-3.975 cw(c-4.525,-3.975) -4.525,-3.825 -4.175,-3.825 -4.14,-3.825 ccw(c-4.14,-3.675) -3.99,-3.675 ccw(c-4.14,-3.675) -4.14,-3.525 -4.175,-3.525 -4.525,-3.525 cw(c-4.525,-3.375) -4.675,-3.375 cw(c-4.525,-3.375) -4.525,-3.225 -4.175,-3.225 -4.14,-3.225 ccw(c-4.14,-3.075) -3.99,-3.075 ccw(c-4.14,-3.075) -4.14,-2.925 -4.175,-2.925 -4.488,-2.925 cw(c-4.488,-2.775) -4.638,-2.775 cw(c-4.488,-2.775) -4.488,-2.625 -4.325,-2.625 ccw(c-4.325,-2.475) -4.175,-2.475 -4.175,-2.325 -4.175,-2.25 -2.832,-0.907 -2.832,0.343 -1.75,1.425 v1(-1,1.425)
  L6 w0.1: IC1.A7 v1@-0.995,1.431
D2: IC1.A5 J2.4 | length 17.7
  L1 w0.1: v1(-3.775,-9.125) -3.775,-10.425 J2.4